# Allegro board FPCBMirror.brd
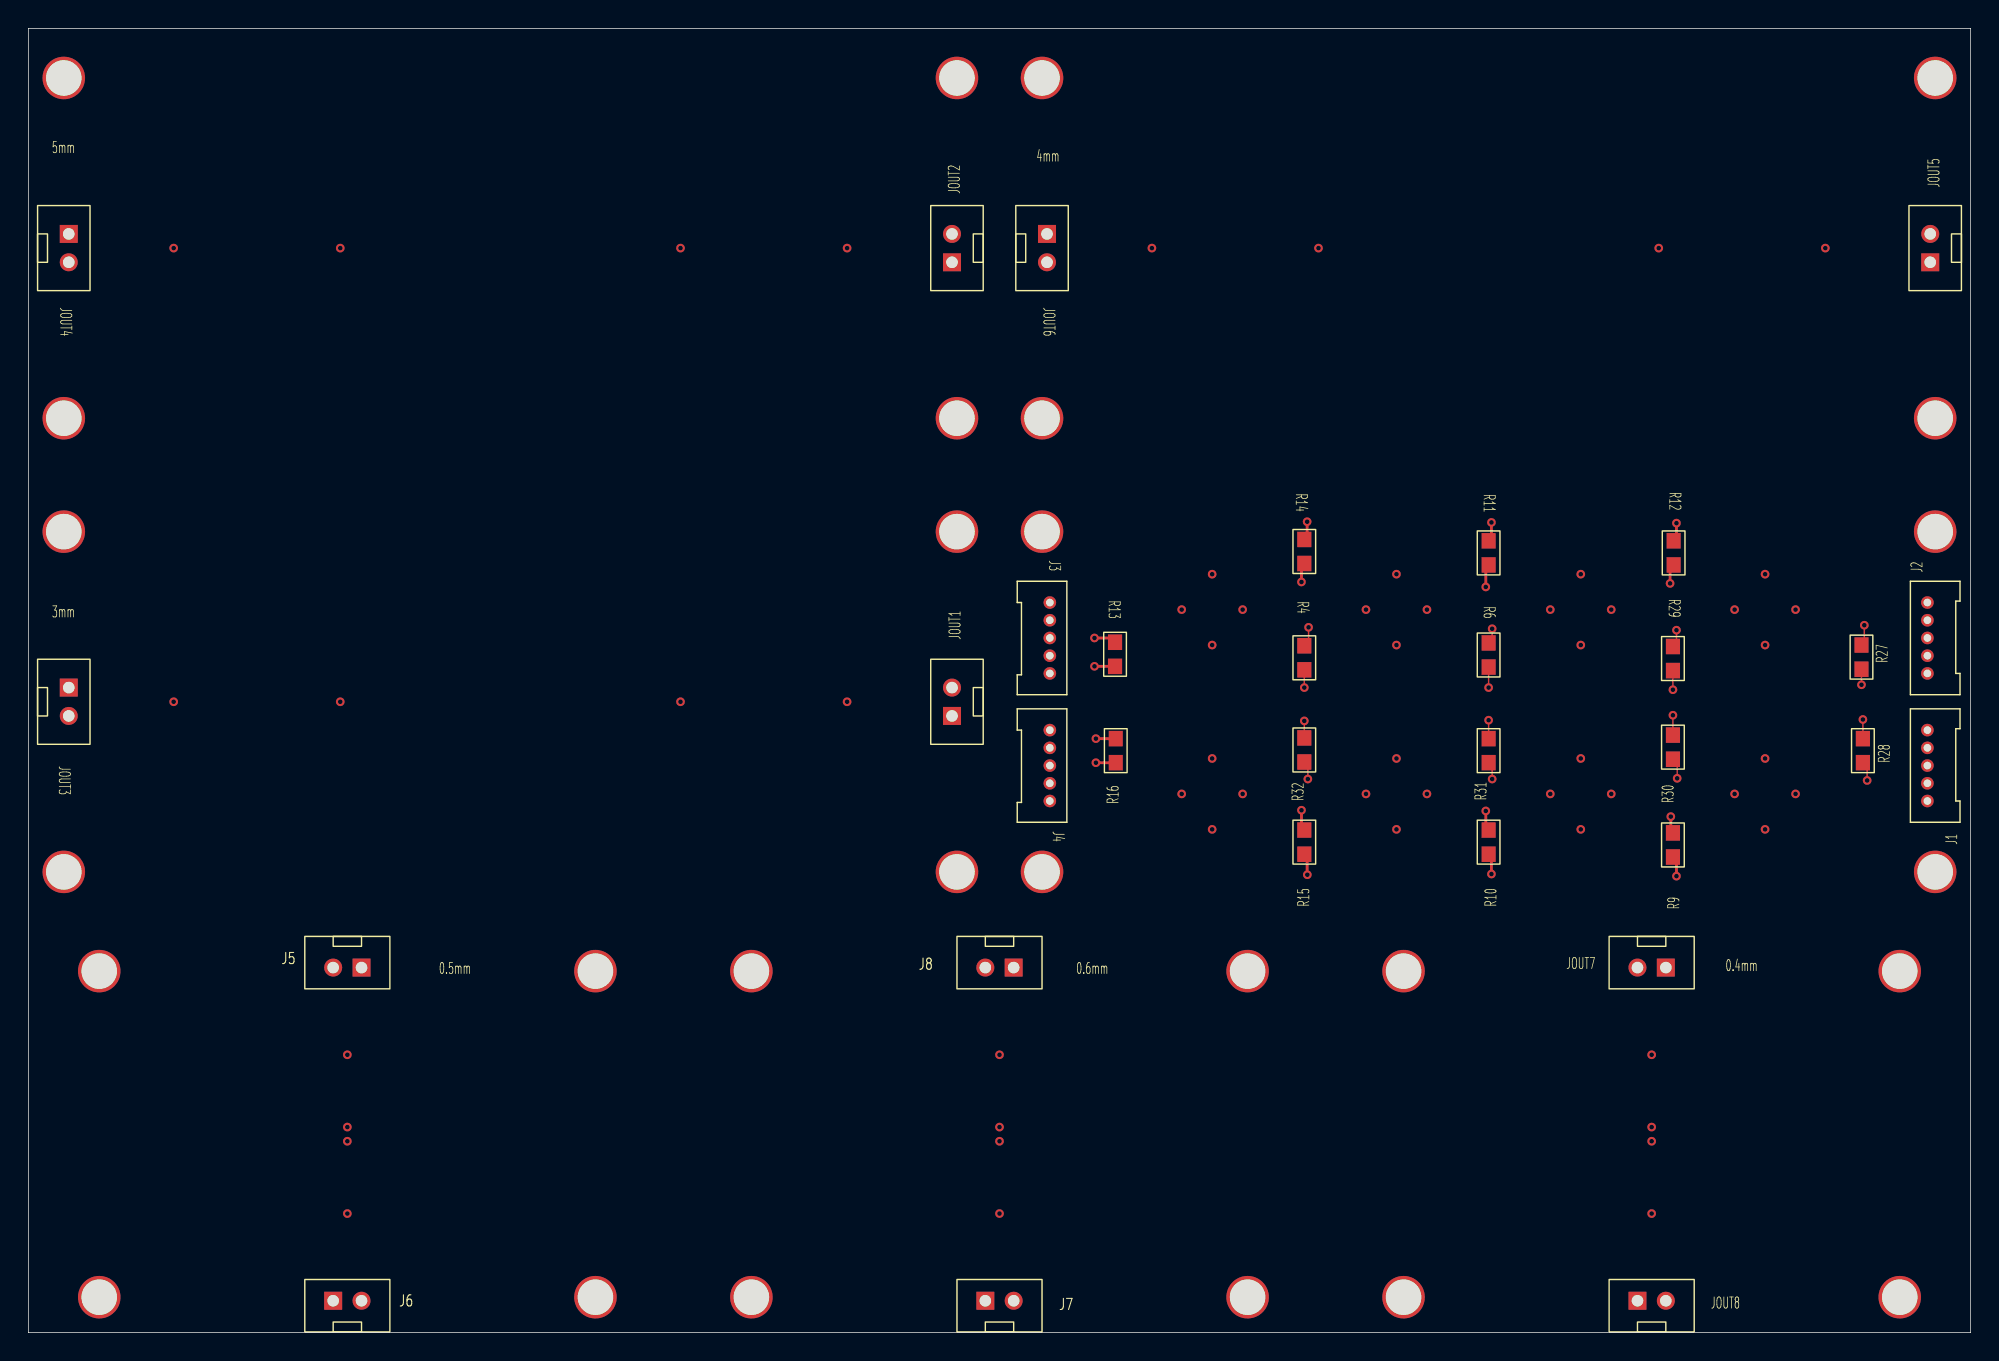
[diagram p0: board, top side]
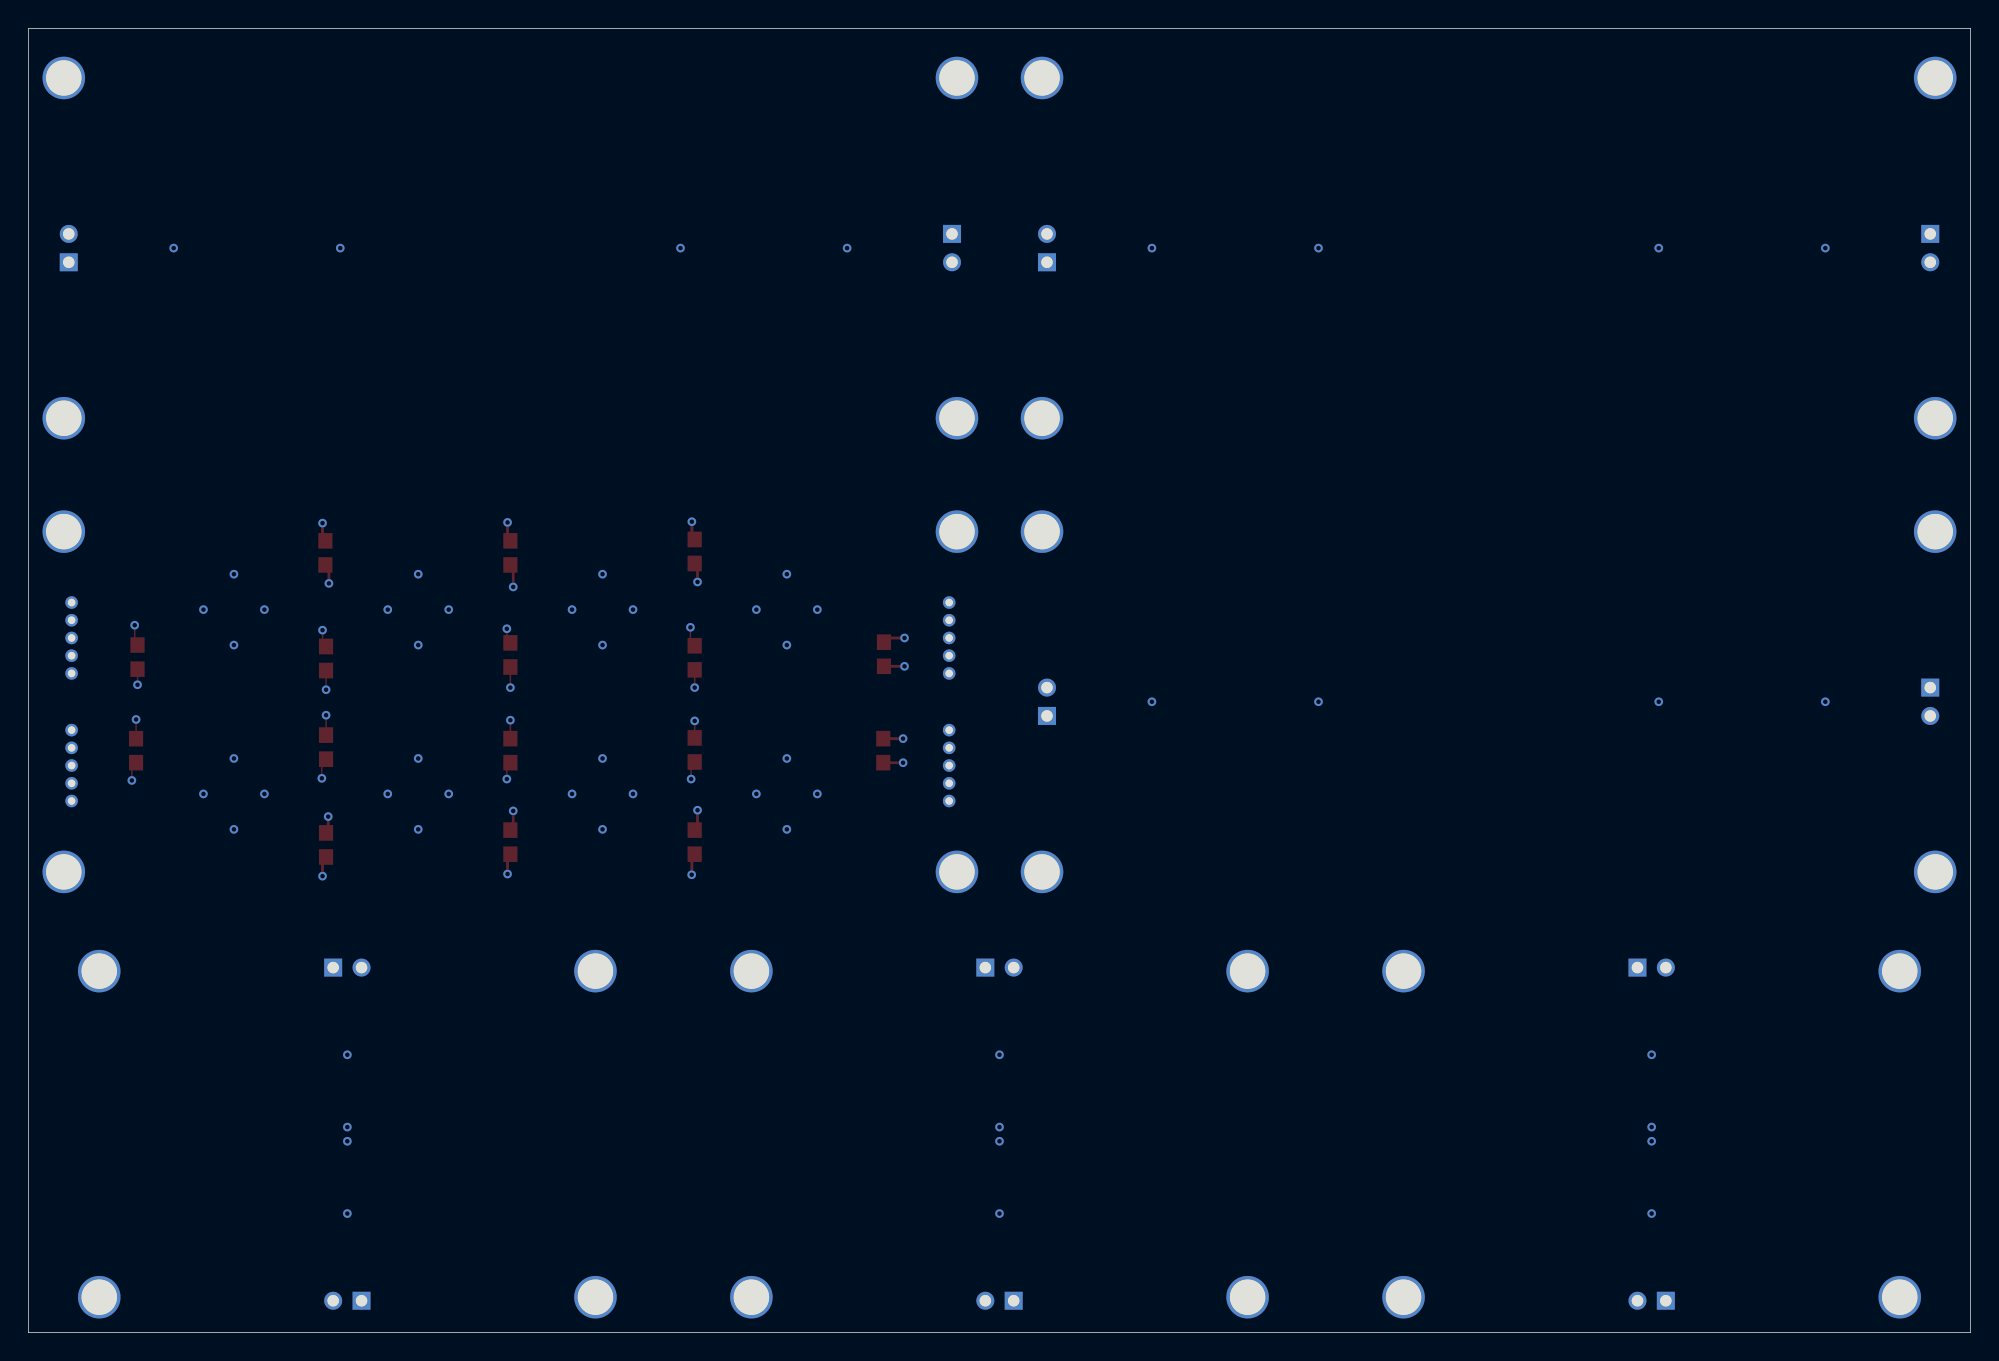
[diagram p1: board, bottom side, seen from below]

Outline 137 x 92 mm; copper layers: TOP, LAYER1, LAYER2, LAYER3, LAYER4, BOTTOM. Coordinates in mm from the lower left corner of the outline.
Outline path: 0,92 137,92 137,0 0,0 0,92

## Design rules (mm)
constraint set DEFAULT: min track width 0.1

## Placement (name value [footprint] x y rotation side)
J1  -  [DF13-5P]  133.95 40 90 top
J2  -  [DF13-5P]  133.95 49 90 top
J3  -  [DF13-5P]  72.05 49 270 top
J4  -  [DF13-5P]  72.05 40 270 top
J5  CON2  [53253-2P]  16.5 25.75 180 top
J6  CON2  [53253-2P]  28.5 2.25 0 top
J7  CON2  [53253-2P]  74.5 2.25 0 top
J8  CON2  [53253-2P]  62.5 25.75 180 top
JOUT1  CON2  [53253-2P]  65.15 50.5 90 top
JOUT2  CON2  [53253-2P]  65.15 82.5 90 top
JOUT3  CON2  [53253-2P]  2.85 38.5 270 top
JOUT4  CON2  [53253-2P]  2.85 70.5 270 top
JOUT5  CON2  [53253-2P]  134.15 82.5 90 top
JOUT6  CON2  [53253-2P]  71.85 70.5 270 top
JOUT7  CON2  [53253-2P]  108.5 25.75 180 top
JOUT8  CON2  [53253-2P]  120.5 2.25 0 top
NOREF  -  [unnamed]  51.23 3.31 0 top
NOREF#2  -  [unnamed]  2.73 89.31 0 top
NOREF#3  -  [unnamed]  134.73 57.31 0 top
NOREF#4  -  [#2]  62.5 12.09 0 top
NOREF#5  -  [unnamed]  97.23 3.31 0 top
NOREF#6  -  [unnamed]  134.73 33.31 0 top
NOREF#7  -  [unnamed]  97.23 26.31 0 top
NOREF#8  -  [unnamed]  71.73 57.31 0 top
NOREF#9  -  [unnamed]  2.73 33.31 0 top
NOREF#10  -  [#2]  67.48 20.5 90 top
NOREF#11  -  [unnamed]  40.23 26.31 0 top
NOREF#12  -  [unnamed]  134.73 89.31 0 top
NOREF#13  -  [unnamed]  86.23 26.31 0 top
NOREF#14  -  [unnamed]  65.73 33.31 0 top
NOREF#15  -  [#2]  72.35 7.5 90 top
NOREF#16  -  [#2]  83.9 5 90 top
NOREF#17  -  [unnamed]  5.23 26.31 0 top
NOREF#18  -  [unnamed]  71.73 33.31 0 top
NOREF#19  -  [unnamed]  65.73 65.31 0 top
NOREF#20  -  [unnamed]  134.73 65.31 0 top
NOREF#21  -  [unnamed]  2.73 65.31 0 top
NOREF#22  -  [#2]  68.2 21.84 0 top
NOREF#23  -  [#2]  46 5.31 0 top
NOREF#24  -  [unnamed]  65.73 57.31 0 top
NOREF#25  -  [unnamed]  5.23 3.31 0 top
NOREF#26  -  [unnamed]  65.73 89.31 0 top
NOREF#27  -  [unnamed]  2.73 57.31 0 top
NOREF#28  -  [unnamed]  132.23 3.31 0 top
NOREF#29  -  [#2]  48.92 0 90 top
NOREF#30  -  [unnamed]  71.73 65.31 0 top
NOREF#31  -  [unnamed]  51.23 26.31 0 top
NOREF#32  -  [unnamed]  86.23 3.31 0 top
NOREF#33  -  [#2]  48.5 10.5 0 top
NOREF#34  -  [unnamed]  40.23 3.31 0 top
NOREF#35  -  [#2]  -16 -38.6 0 top
NOREF#36  -  [unnamed]  132.23 26.31 0 top
NOREF#37  -  [#2]  0 0 0 top
NOREF#38  -  [unnamed]  71.73 89.31 0 top
NOREF#39  -  [#2]  137 0 90 top
R4  10K 1/10w 1%  [SMD0603]  90 47.6 270 top
R6  10K 1/10w 1%  [SMD0603]  103 47.8 270 top
R9  10K 1/10w 1%  [SMD0603]  116 34.4 90 top
R10  10K 1/10w 1%  [SMD0603]  103 34.6 90 top
R11  10K 1/10w 1%  [SMD0603]  103 55 270 top
R12  10K 1/10w 1%  [SMD0603]  116.05 55 270 top
R13  10K 1/10w 1%  [SMD0603]  76.65 47.85 270 top
R14  10K 1/10w 1%  [SMD0603]  90 55.1 90 top
R15  10K 1/10w 1%  [SMD0603]  90 34.6 90 top
R16  10K 1/10w 1%  [SMD0603]  76.7 41.05 90 top
R27  10K 1/10w 1%  [SMD0603]  129.3 47.65 90 top
R28  10K 1/10w 1%  [SMD0603]  129.4 41.05 90 top
R29  10K 1/10w 1%  [SMD0603]  116 47.55 90 top
R30  10K 1/10w 1%  [SMD0603]  116 41.3 90 top
R31  10K 1/10w 1%  [SMD0603]  103 41.05 90 top
R32  10K 1/10w 1%  [SMD0603]  90 41.1 90 top

## Library data of the parts
J1-J4 = CON5
J5-J8 JOUT1-JOUT8 = CON2
R4 R6 R9-R16 R27-R32 = R

## Footprints (pads in the part's own frame, mm; a bottom-side part is the same pattern mirrored in y, then rotated)
53253-2P
  rect 1.27x1.27 hole 0.813: 1(-7,0)
  round 1.27 hole 0.813: 2(-5,0)
DF13-5P
  round 0.889 hole 0.533: 1(-2.5,0) 2(-1.25,0) 3(0,0) 4(1.25,0) 5(2.5,0)
SMD0603
  rect 1.1x1 smd: 1(-0.85,0) 2(0.85,0)
unnamed
  round 3 hole 2.5: 1(-0.229,-0.813)

## Nets
N3020782: JOUT2.1 JOUT2.2
N3020794: JOUT3.1 JOUT3.2
N3020806: JOUT1.1 JOUT1.2
N3020818: JOUT4.1 JOUT4.2
N3020998: J1.1 J1.2 R10.1 R10.2
N3021010: J1.3 J1.4 R9.1 R9.2
N3021347: R4.1 R4.2
N3021519: R6.1 R6.2
N3022339: J2.1 J2.2 R12.1 R12.2
N3022351: J2.3 J2.4 R11.1 R11.2
N3022586: J3.1 J3.2 R14.1 R14.2
N3022598: J3.3 J3.4 R13.1 R13.2
N3022833: J4.1 J4.2 R16.1 R16.2
N3022845: J4.3 J4.4 R15.1 R15.2
N3024190: JOUT5.1 JOUT5.2
N3024220: JOUT6.1 JOUT6.2
N3024232: JOUT8.1 JOUT8.2
N3024244: JOUT7.1 JOUT7.2
N3025698: R27.1 R27.2
N3025754: R28.1 R28.2
N3025984: R29.1 R29.2
N3026004: R30.1 R30.2
N3026060: R31.1 R31.2
N3026080: R32.1 R32.2
N3027014: J5.1 J5.2
N3027026: J6.1 J6.2
N3027142: J7.1 J7.2
N3027154: J8.1 J8.2

Pads without a net: J1 5; J2 5; J3 5; J4 5; NOREF 1; NOREF#2 1; NOREF#3 1; NOREF#5 1; NOREF#6 1; NOREF#7 1; NOREF#8 1; NOREF#9 1; NOREF#11 1; NOREF#12 1; NOREF#13 1; NOREF#14 1; NOREF#17 1; NOREF#18 1; NOREF#19 1; NOREF#20 1; NOREF#21 1; NOREF#24 1; NOREF#25 1; NOREF#26 1; NOREF#27 1; NOREF#28 1; NOREF#30 1; NOREF#31 1; NOREF#32 1; NOREF#34 1; NOREF#36 1; NOREF#38 1

## Via types
v1: diameter 0.61, hole 0.33, TOP to BOTTOM, 88 vias

## Routing (per net, layer and track width the routed paths; a pad name or vN(x,y) marks a point on that pad's centre or on a via; arc(x,y) is an arc through that point)
N3020782: length 15.6
  LAYER2 w0.1: JOUT2.2 64.24,76.59 arc(64.14,76.52) 64.03,76.5 v1(57.75,76.5)
  LAYER3 w0.1: JOUT2.1 64.24,76.41 arc(64.14,76.48) 64.03,76.5 v1(57.75,76.5)
N3020794: length 11618.6
  LAYER1 w0.2: v1(10.25,44.5) 10.25,33.65 arc(10.54,32.94) 11.25,32.65 56.4,32.65 arc(56.75,32.8) 56.9,33.15 56.9,55.8 arc(56.75,56.15) 56.4,56.3 11.55,56.3 arc(11.2,56.15) 11.05,55.8 11.05,33.45 arc(11.2,33.1) 11.55,32.95 56.1,32.95 arc(56.45,33.1) 56.6,33.45 56.6,55.5 arc(56.45,55.85) 56.1,56 11.85,56 arc(11.5,55.85) 11.35,55.5 11.35,33.75 arc(11.5,33.4) 11.85,33.25 55.8,33.25 arc(56.15,33.4) 56.3,33.75 56.3,55.2 arc(56.15,55.55) 55.8,55.7 12.15,55.7 arc(11.8,55.55) 11.65,55.2 11.65,34.05 arc(11.8,33.7) 12.15,33.55 55.5,33.55 arc(55.85,33.7) 56,34.05 56,54.9 arc(55.85,55.25) 55.5,55.4 12.45,55.4 arc(12.1,55.25) 11.95,54.9 11.95,34.35 arc(12.1,34) 12.45,33.85 55.2,33.85 arc(55.55,34) 55.7,34.35 55.7,54.6 arc(55.55,54.95) 55.2,55.1 12.75,55.1 arc(12.4,54.95) 12.25,54.6 12.25,34.65 arc(12.4,34.3) 12.75,34.15 54.9,34.15 arc(55.25,34.3) 55.4,34.65 55.4,54.3 arc(55.25,54.65) 54.9,54.8 13.05,54.8 arc(12.7,54.65) 12.55,54.3 12.55,34.95 arc(12.7,34.6) 13.05,34.45 54.6,34.45 arc(54.95,34.6) 55.1,34.95 55.1,54 arc(54.95,54.35) 54.6,54.5 13.35,54.5 arc(13,54.35) 12.85,54 12.85,35.25 arc(13,34.9) 13.35,34.75 54.3,34.75 arc(54.65,34.9) 54.8,35.25 54.8,53.7 arc(54.65,54.05) 54.3,54.2 13.65,54.2 arc(13.3,54.05) 13.15,53.7 13.15,35.55 arc(13.3,35.2) 13.65,35.05 54,35.05 arc(54.35,35.2) 54.5,35.55 54.5,53.4 arc(54.35,53.75) 54,53.9 13.95,53.9 arc(13.6,53.75) 13.45,53.4 13.45,35.85 arc(13.6,35.5) 13.95,35.35 53.7,35.35 arc(54.05,35.5) 54.2,35.85 54.2,53.1 arc(54.05,53.45) 53.7,53.6 14.25,53.6 arc(13.9,53.45) 13.75,53.1 13.75,36.15 arc(13.9,35.8) 14.25,35.65 53.4,35.65 arc(53.75,35.8) 53.9,36.15 53.9,52.8 arc(53.75,53.15) 53.4,53.3 14.55,53.3 arc(14.2,53.15) 14.05,52.8 14.05,36.45 arc(14.2,36.1) 14.55,35.95 53.1,35.95 arc(53.45,36.1) 53.6,36.45 53.6,52.5 arc(53.45,52.85) 53.1,53 14.85,53 arc(14.5,52.85) 14.35,52.5 14.35,36.75 arc(14.5,36.4) 14.85,36.25 52.8,36.25 arc(53.15,36.4) 53.3,36.75 53.3,52.2 arc(53.15,52.55) 52.8,52.7 15.15,52.7 arc(14.8,52.55) 14.65,52.2 14.65,37.05 arc(14.8,36.7) 15.15,36.55 52.5,36.55 arc(52.85,36.7) 53,37.05 53,51.9 arc(52.85,52.25) 52.5,52.4 15.45,52.4 arc(15.1,52.25) 14.95,51.9 14.95,37.35 arc(15.1,37) 15.45,36.85 52.2,36.85 arc(52.55,37) 52.7,37.35 52.7,51.6 arc(52.55,51.95) 52.2,52.1 15.75,52.1 arc(15.4,51.95) 15.25,51.6 15.25,37.65 arc(15.4,37.3) 15.75,37.15 51.9,37.15 arc(52.25,37.3) 52.4,37.65 52.4,51.3 arc(52.25,51.65) 51.9,51.8 16.05,51.8 arc(15.7,51.65) 15.55,51.3 15.55,37.95 arc(15.7,37.6) 16.05,37.45 51.6,37.45 arc(51.95,37.6) 52.1,37.95 52.1,51 arc(51.95,51.35) 51.6,51.5 16.35,51.5 arc(16,51.35) 15.85,51 15.85,38.25 arc(16,37.9) 16.35,37.75 51.3,37.75 arc(51.65,37.9) 51.8,38.25 51.8,50.7 arc(51.65,51.05) 51.3,51.2 16.65,51.2 arc(16.3,51.05) 16.15,50.7 16.15,38.55 arc(16.3,38.2) 16.65,38.05 51,38.05 arc(51.35,38.2) 51.5,38.55 51.5,50.4 arc(51.35,50.75) 51,50.9 16.95,50.9 arc(16.6,50.75) 16.45,50.4 16.45,38.85 arc(16.6,38.5) 16.95,38.35 50.7,38.35 arc(51.05,38.5) 51.2,38.85 51.2,50.1 arc(51.05,50.45) 50.7,50.6 17.25,50.6 arc(16.9,50.45) 16.75,50.1 16.75,39.15 arc(16.9,38.8) 17.25,38.65 50.4,38.65 arc(50.75,38.8) 50.9,39.15 50.9,49.8 arc(50.75,50.15) 50.4,50.3 17.55,50.3 arc(17.2,50.15) 17.05,49.8 17.05,39.45 arc(17.2,39.1) 17.55,38.95 50.1,38.95 arc(50.45,39.1) 50.6,39.45 50.6,49.5 arc(50.45,49.85) 50.1,50 17.85,50 arc(17.5,49.85) 17.35,49.5 17.35,39.75 arc(17.5,39.4) 17.85,39.25 49.8,39.25 arc(50.15,39.4) 50.3,39.75 50.3,49.2 arc(50.15,49.55) 49.8,49.7 18.15,49.7 arc(17.8,49.55) 17.65,49.2 17.65,40.05 arc(17.8,39.7) 18.15,39.55 49.5,39.55 arc(49.85,39.7) 50,40.05 50,48.9 arc(49.85,49.25) 49.5,49.4 18.45,49.4 arc(18.1,49.25) 17.95,48.9 17.95,40.35 arc(18.1,40) 18.45,39.85 49.2,39.85 arc(49.55,40) 49.7,40.35 49.7,48.6 arc(49.55,48.95) 49.2,49.1 18.75,49.1 arc(18.4,48.95) 18.25,48.6 18.25,40.65 arc(18.4,40.3) 18.75,40.15 48.9,40.15 arc(49.25,40.3) 49.4,40.65 49.4,48.3 arc(49.25,48.65) 48.9,48.8 19.05,48.8 arc(18.7,48.65) 18.55,48.3 18.55,40.95 arc(18.7,40.6) 19.05,40.45 48.6,40.45 arc(48.95,40.6) 49.1,40.95 49.1,48 arc(48.95,48.35) 48.6,48.5 19.35,48.5 arc(19,48.35) 18.85,48 18.85,41.25 arc(19,40.9) 19.35,40.75 48.3,40.75 arc(48.65,40.9) 48.8,41.25 48.8,47.7 arc(48.65,48.05) 48.3,48.2 19.65,48.2 arc(19.3,48.05) 19.15,47.7 19.15,41.55 arc(19.3,41.2) 19.65,41.05 48,41.05 arc(48.35,41.2) 48.5,41.55 48.5,47.4 arc(48.35,47.75) 48,47.9 19.95,47.9 arc(19.6,47.75) 19.45,47.4 19.45,41.85 arc(19.6,41.5) 19.95,41.35 47.7,41.35 arc(48.05,41.5) 48.2,41.85 48.2,47.1 arc(48.05,47.45) 47.7,47.6 20.25,47.6 arc(19.9,47.45) 19.75,47.1 19.75,42.15 arc(19.9,41.8) 20.25,41.65 47.4,41.65 arc(47.75,41.8) 47.9,42.15 47.9,46.8 arc(47.75,47.15) 47.4,47.3 20.55,47.3 arc(20.2,47.15) 20.05,46.8 20.05,42.45 arc(20.2,42.1) 20.55,41.95 47.1,41.95 arc(47.45,42.1) 47.6,42.45 47.6,46.5 arc(47.45,46.85) 47.1,47 20.85,47 arc(20.5,46.85) 20.35,46.5 20.35,42.75 arc(20.5,42.4) 20.85,42.25 46.8,42.25 arc(47.15,42.4) 47.3,42.75 47.3,46.2 arc(47.15,46.55) 46.8,46.7 22.5,46.7 arc(22.15,46.55) 22,46.2 v1(22,44.5)
  LAYER2 w0.1: 9.55,44.8 4.08,44.8 arc(4.01,44.82) 3.94,44.86 3.36,45.44 arc(3.29,45.48) 3.22,45.5 3.05,45.5 arc(3.19,45.44) 3.25,45.3 3.25,45.18 arc(3.27,45.11) 3.31,45.04 3.79,44.56 arc(3.86,44.52) 3.93,44.5 9.55,44.5 ; JOUT3.1 2.85,45.13 arc(2.87,45.06) 2.91,44.99 3.64,44.26 arc(3.71,44.22) 3.78,44.2 9.55,44.2
  LAYER2 w0.3: v1(22,44.5) 22,42.6 arc(22.15,42.25) 22.5,42.1 46.95,42.1 arc(47.3,42.25) 47.45,42.6 47.45,46.35 arc(47.3,46.7) 46.95,46.85 20.7,46.85 arc(20.35,46.7) 20.2,46.35 20.2,42.2 arc(20.35,41.85) 20.7,41.7 47.35,41.7 arc(47.7,41.85) 47.85,42.2 47.85,46.75 arc(47.7,47.1) 47.35,47.25 20.3,47.25 arc(19.95,47.1) 19.8,46.75 19.8,41.8 arc(19.95,41.45) 20.3,41.3 47.75,41.3 arc(48.1,41.45) 48.25,41.8 48.25,47.15 arc(48.1,47.5) 47.75,47.65 19.9,47.65 arc(19.55,47.5) 19.4,47.15 19.4,41.4 arc(19.55,41.05) 19.9,40.9 48.15,40.9 arc(48.5,41.05) 48.65,41.4 48.65,47.55 arc(48.5,47.9) 48.15,48.05 19.5,48.05 arc(19.15,47.9) 19,47.55 19,41 arc(19.15,40.65) 19.5,40.5 48.55,40.5 arc(48.9,40.65) 49.05,41 49.05,47.95 arc(48.9,48.3) 48.55,48.45 19.1,48.45 arc(18.75,48.3) 18.6,47.95 18.6,40.6 arc(18.75,40.25) 19.1,40.1 48.95,40.1 arc(49.3,40.25) 49.45,40.6 49.45,48.35 arc(49.3,48.7) 48.95,48.85 18.7,48.85 arc(18.35,48.7) 18.2,48.35 18.2,40.2 arc(18.35,39.85) 18.7,39.7 49.35,39.7 arc(49.7,39.85) 49.85,40.2 49.85,48.75 arc(49.7,49.1) 49.35,49.25 18.3,49.25 arc(17.95,49.1) 17.8,48.75 17.8,39.8 arc(17.95,39.45) 18.3,39.3 49.75,39.3 arc(50.1,39.45) 50.25,39.8 50.25,49.15 arc(50.1,49.5) 49.75,49.65 17.9,49.65 arc(17.55,49.5) 17.4,49.15 17.4,39.4 arc(17.55,39.05) 17.9,38.9 50.15,38.9 arc(50.5,39.05) 50.65,39.4 50.65,49.55 arc(50.5,49.9) 50.15,50.05 17.5,50.05 arc(17.15,49.9) 17,49.55 17,39 arc(17.15,38.65) 17.5,38.5 50.55,38.5 arc(50.9,38.65) 51.05,39 51.05,49.95 arc(50.9,50.3) 50.55,50.45 17.1,50.45 arc(16.75,50.3) 16.6,49.95 16.6,38.6 arc(16.75,38.25) 17.1,38.1 50.95,38.1 arc(51.3,38.25) 51.45,38.6 51.45,50.35 arc(51.3,50.7) 50.95,50.85 16.7,50.85 arc(16.35,50.7) 16.2,50.35 16.2,38.2 arc(16.35,37.85) 16.7,37.7 51.35,37.7 arc(51.7,37.85) 51.85,38.2 51.85,50.75 arc(51.7,51.1) 51.35,51.25 16.3,51.25 arc(15.95,51.1) 15.8,50.75 15.8,37.8 arc(15.95,37.45) 16.3,37.3 51.75,37.3 arc(52.1,37.45) 52.25,37.8 52.25,51.15 arc(52.1,51.5) 51.75,51.65 15.9,51.65 arc(15.55,51.5) 15.4,51.15 15.4,37.4 arc(15.55,37.05) 15.9,36.9 52.15,36.9 arc(52.5,37.05) 52.65,37.4 52.65,51.55 arc(52.5,51.9) 52.15,52.05 15.5,52.05 arc(15.15,51.9) 15,51.55 15,36.95 arc(15.13,36.63) 15.45,36.5 52.55,36.5 arc(52.9,36.65) 53.05,37 53.05,51.95 arc(52.9,52.3) 52.55,52.45 15.1,52.45 arc(14.75,52.3) 14.6,51.95 14.6,36.6 arc(14.75,36.25) 15.1,36.1 52.95,36.1 arc(53.3,36.25) 53.45,36.6 53.45,52.35 arc(53.3,52.7) 52.95,52.85 14.7,52.85 arc(14.35,52.7) 14.2,52.35 14.2,36.2 arc(14.35,35.85) 14.7,35.7 53.35,35.7 arc(53.7,35.85) 53.85,36.2 53.85,52.75 arc(53.7,53.1) 53.35,53.25 14.3,53.25 arc(13.95,53.1) 13.8,52.75 13.8,35.65 arc(13.9,35.4) 14.15,35.3 53.75,35.3 arc(54.1,35.45) 54.25,35.8 54.25,53.15 arc(54.1,53.5) 53.75,53.65 13.9,53.65 arc(13.55,53.5) 13.4,53.15 13.4,35.3 arc(13.52,35.02) 13.8,34.9 54.15,34.9 arc(54.5,35.05) 54.65,35.4 54.65,53.55 arc(54.5,53.9) 54.15,54.05 13.4,54.05 arc(13.12,53.93) 13,53.65 13,35 arc(13.15,34.65) 13.5,34.5 54.55,34.5 arc(54.9,34.65) 55.05,35 55.05,53.95 arc(54.9,54.3) 54.55,54.45 12.95,54.45 arc(12.7,54.35) 12.6,54.1 12.6,34.6 arc(12.75,34.25) 13.1,34.1 54.95,34.1 arc(55.3,34.25) 55.45,34.6 55.45,54.35 arc(55.3,54.7) 54.95,54.85 12.7,54.85 arc(12.35,54.7) 12.2,54.35 12.2,34.2 arc(12.35,33.85) 12.7,33.7 55.35,33.7 arc(55.7,33.85) 55.85,34.2 55.85,54.75 arc(55.7,55.1) 55.35,55.25 12.3,55.25 arc(11.95,55.1) 11.8,54.75 11.8,33.8 arc(11.95,33.45) 12.3,33.3 55.75,33.3 arc(56.1,33.45) 56.25,33.8 56.25,55.15 arc(56.1,55.5) 55.75,55.65 11.9,55.65 arc(11.55,55.5) 11.4,55.15 11.4,33.4 arc(11.55,33.05) 11.9,32.9 56.15,32.9 arc(56.5,33.05) 56.65,33.4 56.65,55.55 arc(56.5,55.9) 56.15,56.05 11.5,56.05 arc(11.15,55.9) 11,55.55 11,33 arc(11.15,32.65) 11.5,32.5 56.55,32.5 arc(56.9,32.65) 57.05,33 57.05,55.95 arc(56.9,56.3) 56.55,56.45 11,56.45 arc(10.65,56.3) 10.5,55.95 10.5,46.21 arc(10.46,46.02) 10.35,45.85 9.7,45.2 arc(9.59,45.03) 9.55,44.84 9.55,44.2
  LAYER3 w0.1: 9.55,44.5 3.98,44.5 arc(3.86,44.48) 3.76,44.41 JOUT3.2 ; JOUT3.2 3.27,43.5 arc(3.34,43.52) 3.41,43.56 3.89,44.04 arc(4.07,44.16) 4.28,44.2 9.55,44.2 ; JOUT3.2 2.85,43.72 arc(2.87,43.84) 2.94,43.94 3.71,44.71 arc(3.81,44.78) 3.93,44.8 9.55,44.8
  LAYER3 w0.3: v1(46,44.5) 46,42.8 arc(45.85,42.45) 45.5,42.3 20.9,42.3 arc(20.55,42.45) 20.4,42.8 20.4,46.55 arc(20.55,46.9) 20.9,47.05 47.15,47.05 arc(47.5,46.9) 47.65,46.55 47.65,42.4 arc(47.5,42.05) 47.15,41.9 20.5,41.9 arc(20.15,42.05) 20,42.4 20,46.95 arc(20.15,47.3) 20.5,47.45 47.55,47.45 arc(47.9,47.3) 48.05,46.95 48.05,42 arc(47.9,41.65) 47.55,41.5 20.1,41.5 arc(19.75,41.65) 19.6,42 19.6,47.35 arc(19.75,47.7) 20.1,47.85 47.95,47.85 arc(48.3,47.7) 48.45,47.35 48.45,41.6 arc(48.3,41.25) 47.95,41.1 19.7,41.1 arc(19.35,41.25) 19.2,41.6 19.2,47.75 arc(19.35,48.1) 19.7,48.25 48.35,48.25 arc(48.7,48.1) 48.85,47.75 48.85,41.2 arc(48.7,40.85) 48.35,40.7 19.3,40.7 arc(18.95,40.85) 18.8,41.2 18.8,48.15 arc(18.95,48.5) 19.3,48.65 48.75,48.65 arc(49.1,48.5) 49.25,48.15 49.25,40.8 arc(49.1,40.45) 48.75,40.3 18.9,40.3 arc(18.55,40.45) 18.4,40.8 18.4,48.55 arc(18.55,48.9) 18.9,49.05 49.15,49.05 arc(49.5,48.9) 49.65,48.55 49.65,40.4 arc(49.5,40.05) 49.15,39.9 18.5,39.9 arc(18.15,40.05) 18,40.4 18,48.95 arc(18.15,49.3) 18.5,49.45 49.55,49.45 arc(49.9,49.3) 50.05,48.95 50.05,40 arc(49.9,39.65) 49.55,39.5 18.1,39.5 arc(17.75,39.65) 17.6,40 17.6,49.35 arc(17.75,49.7) 18.1,49.85 49.95,49.85 arc(50.3,49.7) 50.45,49.35 50.45,39.6 arc(50.3,39.25) 49.95,39.1 17.7,39.1 arc(17.35,39.25) 17.2,39.6 17.2,49.75 arc(17.35,50.1) 17.7,50.25 50.35,50.25 arc(50.7,50.1) 50.85,49.75 50.85,39.2 arc(50.7,38.85) 50.35,38.7 17.3,38.7 arc(16.95,38.85) 16.8,39.2 16.8,50.15 arc(16.95,50.5) 17.3,50.65 50.75,50.65 arc(51.1,50.5) 51.25,50.15 51.25,38.8 arc(51.1,38.45) 50.75,38.3 16.9,38.3 arc(16.55,38.45) 16.4,38.8 16.4,50.55 arc(16.55,50.9) 16.9,51.05 51.15,51.05 arc(51.5,50.9) 51.65,50.55 51.65,38.4 arc(51.5,38.05) 51.15,37.9 16.5,37.9 arc(16.15,38.05) 16,38.4 16,50.95 arc(16.15,51.3) 16.5,51.45 51.55,51.45 arc(51.9,51.3) 52.05,50.95 52.05,38 arc(51.9,37.65) 51.55,37.5 16.1,37.5 arc(15.75,37.65) 15.6,38 15.6,51.35 arc(15.75,51.7) 16.1,51.85 51.95,51.85 arc(52.3,51.7) 52.45,51.35 52.45,37.6 arc(52.3,37.25) 51.95,37.1 15.7,37.1 arc(15.35,37.25) 15.2,37.6 15.2,51.75 arc(15.35,52.1) 15.7,52.25 52.35,52.25 arc(52.7,52.1) 52.85,51.75 52.85,37.2 arc(52.7,36.85) 52.35,36.7 15.3,36.7 arc(14.95,36.85) 14.8,37.2 14.8,52.15 arc(14.95,52.5) 15.3,52.65 52.75,52.65 arc(53.1,52.5) 53.25,52.15 53.25,36.8 arc(53.1,36.45) 52.75,36.3 14.9,36.3 arc(14.55,36.45) 14.4,36.8 14.4,52.55 arc(14.55,52.9) 14.9,53.05 53.15,53.05 arc(53.5,52.9) 53.65,52.55 53.65,36.4 arc(53.5,36.05) 53.15,35.9 14.5,35.9 arc(14.15,36.05) 14,36.4 14,52.95 arc(14.15,53.3) 14.5,53.45 53.55,53.45 arc(53.9,53.3) 54.05,52.95 54.05,36 arc(53.9,35.65) 53.55,35.5 14.1,35.5 arc(13.75,35.65) 13.6,36 13.6,53.35 arc(13.75,53.7) 14.1,53.85 53.95,53.85 arc(54.3,53.7) 54.45,53.35 54.45,35.6 arc(54.3,35.25) 53.95,35.1 13.7,35.1 arc(13.35,35.25) 13.2,35.6 13.2,53.75 arc(13.35,54.1) 13.7,54.25 54.35,54.25 arc(54.7,54.1) 54.85,53.75 54.85,35.2 arc(54.7,34.85) 54.35,34.7 13.3,34.7 arc(12.95,34.85) 12.8,35.2 12.8,54.15 arc(12.95,54.5) 13.3,54.65 54.75,54.65 arc(55.1,54.5) 55.25,54.15 55.25,34.8 arc(55.1,34.45) 54.75,34.3 12.9,34.3 arc(12.55,34.45) 12.4,34.8 12.4,54.55 arc(12.55,54.9) 12.9,55.05 55.15,55.05 arc(55.5,54.9) 55.65,54.55 55.65,34.4 arc(55.5,34.05) 55.15,33.9 12.5,33.9 arc(12.15,34.05) 12,34.4 12,54.95 arc(12.15,55.3) 12.5,55.45 55.55,55.45 arc(55.9,55.3) 56.05,54.95 56.05,34 arc(55.9,33.65) 55.55,33.5 12.1,33.5 arc(11.75,33.65) 11.6,34 11.6,55.35 arc(11.75,55.7) 12.1,55.85 55.95,55.85 arc(56.3,55.7) 56.45,55.35 56.45,33.6 arc(56.3,33.25) 55.95,33.1 11.7,33.1 arc(11.35,33.25) 11.2,33.6 11.2,55.75 arc(11.35,56.1) 11.7,56.25 56.35,56.25 arc(56.7,56.1) 56.85,55.75 56.85,33.2 arc(56.7,32.85) 56.35,32.7 10.75,32.7 arc(10.57,32.77) 10.5,32.95 10.5,42.79 arc(10.46,42.98) 10.35,43.15 9.7,43.8 arc(9.59,43.97) 9.55,44.16 9.55,44.8
  LAYER4 w0.2: v1(46,44.5) 46,46.35 arc(45.85,46.7) 45.5,46.85 20.7,46.85 arc(20.35,46.7) 20.2,46.35 20.2,42.6 arc(20.35,42.25) 20.7,42.1 47.25,42.1 arc(47.6,42.25) 47.75,42.6 47.75,46.65 arc(47.6,47) 47.25,47.15 20.4,47.15 arc(20.05,47) 19.9,46.65 19.9,42.3 arc(20.05,41.95) 20.4,41.8 47.55,41.8 arc(47.9,41.95) 48.05,42.3 48.05,46.95 arc(47.9,47.3) 47.55,47.45 20.1,47.45 arc(19.75,47.3) 19.6,46.95 19.6,42 arc(19.75,41.65) 20.1,41.5 47.85,41.5 arc(48.2,41.65) 48.35,42 48.35,47.25 arc(48.2,47.6) 47.85,47.75 19.8,47.75 arc(19.45,47.6) 19.3,47.25 19.3,41.7 arc(19.45,41.35) 19.8,41.2 48.15,41.2 arc(48.5,41.35) 48.65,41.7 48.65,47.55 arc(48.5,47.9) 48.15,48.05 19.5,48.05 arc(19.15,47.9) 19,47.55 19,41.4 arc(19.15,41.05) 19.5,40.9 48.45,40.9 arc(48.8,41.05) 48.95,41.4 48.95,47.85 arc(48.8,48.2) 48.45,48.35 19.2,48.35 arc(18.85,48.2) 18.7,47.85 18.7,41.1 arc(18.85,40.75) 19.2,40.6 48.75,40.6 arc(49.1,40.75) 49.25,41.1 49.25,48.15 arc(49.1,48.5) 48.75,48.65 18.9,48.65 arc(18.55,48.5) 18.4,48.15 18.4,40.8 arc(18.55,40.45) 18.9,40.3 49.05,40.3 arc(49.4,40.45) 49.55,40.8 49.55,48.45 arc(49.4,48.8) 49.05,48.95 18.6,48.95 arc(18.25,48.8) 18.1,48.45 18.1,40.5 arc(18.25,40.15) 18.6,40 49.35,40 arc(49.7,40.15) 49.85,40.5 49.85,48.75 arc(49.7,49.1) 49.35,49.25 18.3,49.25 arc(17.95,49.1) 17.8,48.75 17.8,40.2 arc(17.95,39.85) 18.3,39.7 49.65,39.7 arc(50,39.85) 50.15,40.2 50.15,49.05 arc(50,49.4) 49.65,49.55 18,49.55 arc(17.65,49.4) 17.5,49.05 17.5,39.9 arc(17.65,39.55) 18,39.4 49.95,39.4 arc(50.3,39.55) 50.45,39.9 50.45,49.35 arc(50.3,49.7) 49.95,49.85 17.7,49.85 arc(17.35,49.7) 17.2,49.35 17.2,39.6 arc(17.35,39.25) 17.7,39.1 50.25,39.1 arc(50.6,39.25) 50.75,39.6 50.75,49.65 arc(50.6,50) 50.25,50.15 17.4,50.15 arc(17.05,50) 16.9,49.65 16.9,39.3 arc(17.05,38.95) 17.4,38.8 50.55,38.8 arc(50.9,38.95) 51.05,39.3 51.05,49.95 arc(50.9,50.3) 50.55,50.45 17.1,50.45 arc(16.75,50.3) 16.6,49.95 16.6,39 arc(16.75,38.65) 17.1,38.5 50.85,38.5 arc(51.2,38.65) 51.35,39 51.35,50.25 arc(51.2,50.6) 50.85,50.75 16.8,50.75 arc(16.45,50.6) 16.3,50.25 16.3,38.7 arc(16.45,38.35) 16.8,38.2 51.15,38.2 arc(51.5,38.35) 51.65,38.7 51.65,50.55 arc(51.5,50.9) 51.15,51.05 16.5,51.05 arc(16.15,50.9) 16,50.55 16,38.4 arc(16.15,38.05) 16.5,37.9 51.45,37.9 arc(51.8,38.05) 51.95,38.4 51.95,50.85 arc(51.8,51.2) 51.45,51.35 16.2,51.35 arc(15.85,51.2) 15.7,50.85 15.7,38.1 arc(15.85,37.75) 16.2,37.6 51.75,37.6 arc(52.1,37.75) 52.25,38.1 52.25,51.15 arc(52.1,51.5) 51.75,51.65 15.9,51.65 arc(15.55,51.5) 15.4,51.15 15.4,37.8 arc(15.55,37.45) 15.9,37.3 52.05,37.3 arc(52.4,37.45) 52.55,37.8 52.55,51.45 arc(52.4,51.8) 52.05,51.95 15.6,51.95 arc(15.25,51.8) 15.1,51.45 15.1,37.5 arc(15.25,37.15) 15.6,37 52.35,37 arc(52.7,37.15) 52.85,37.5 52.85,51.75 arc(52.7,52.1) 52.35,52.25 15.3,52.25 arc(14.95,52.1) 14.8,51.75 14.8,37.2 arc(14.95,36.85) 15.3,36.7 52.65,36.7 arc(53,36.85) 53.15,37.2 53.15,52.05 arc(53,52.4) 52.65,52.55 15,52.55 arc(14.65,52.4) 14.5,52.05 14.5,36.9 arc(14.65,36.55) 15,36.4 52.95,36.4 arc(53.3,36.55) 53.45,36.9 53.45,52.35 arc(53.3,52.7) 52.95,52.85 14.7,52.85 arc(14.35,52.7) 14.2,52.35 14.2,36.6 arc(14.35,36.25) 14.7,36.1 53.25,36.1 arc(53.6,36.25) 53.75,36.6 53.75,52.65 arc(53.6,53) 53.25,53.15 14.4,53.15 arc(14.05,53) 13.9,52.65 13.9,36.3 arc(14.05,35.95) 14.4,35.8 53.55,35.8 arc(53.9,35.95) 54.05,36.3 54.05,52.95 arc(53.9,53.3) 53.55,53.45 14.1,53.45 arc(13.75,53.3) 13.6,52.95 13.6,36 arc(13.75,35.65) 14.1,35.5 53.85,35.5 arc(54.2,35.65) 54.35,36 54.35,53.25 arc(54.2,53.6) 53.85,53.75 13.8,53.75 arc(13.45,53.6) 13.3,53.25 13.3,35.7 arc(13.45,35.35) 13.8,35.2 54.15,35.2 arc(54.5,35.35) 54.65,35.7 54.65,53.55 arc(54.5,53.9) 54.15,54.05 13.5,54.05 arc(13.15,53.9) 13,53.55 13,35.4 arc(13.15,35.05) 13.5,34.9 54.45,34.9 arc(54.8,35.05) 54.95,35.4 54.95,53.85 arc(54.8,54.2) 54.45,54.35 13.2,54.35 arc(12.85,54.2) 12.7,53.85 12.7,35.1 arc(12.85,34.75) 13.2,34.6 54.75,34.6 arc(55.1,34.75) 55.25,35.1 55.25,54.15 arc(55.1,54.5) 54.75,54.65 12.9,54.65 arc(12.55,54.5) 12.4,54.15 12.4,34.8 arc(12.55,34.45) 12.9,34.3 55.05,34.3 arc(55.4,34.45) 55.55,34.8 55.55,54.45 arc(55.4,54.8) 55.05,54.95 12.6,54.95 arc(12.25,54.8) 12.1,54.45 12.1,34.5 arc(12.25,34.15) 12.6,34 55.35,34 arc(55.7,34.15) 55.85,34.5 55.85,54.75 arc(55.7,55.1) 55.35,55.25 12.3,55.25 arc(11.95,55.1) 11.8,54.75 11.8,34.2 arc(11.95,33.85) 12.3,33.7 55.65,33.7 arc(56,33.85) 56.15,34.2 56.15,55.05 arc(56,55.4) 55.65,55.55 12,55.55 arc(11.65,55.4) 11.5,55.05 11.5,33.9 arc(11.65,33.55) 12,33.4 55.95,33.4 arc(56.3,33.55) 56.45,33.9 56.45,55.35 arc(56.3,55.7) 55.95,55.85 11.7,55.85 arc(11.35,55.7) 11.2,55.35 11.2,33.6 arc(11.35,33.25) 11.7,33.1 56.25,33.1 arc(56.6,33.25) 56.75,33.6 56.75,55.65 arc(56.6,56) 56.25,56.15 11.4,56.15 arc(11.05,56) 10.9,55.65 10.9,33.3 arc(11.05,32.95) 11.4,32.8 56.55,32.8 arc(56.9,32.95) 57.05,33.3 57.05,55.95 arc(56.9,56.3) 56.55,56.45 10.75,56.45 arc(10.4,56.3) 10.25,55.95 v1(10.25,44.5)
N3020806: length 47.8
  LAYER2 w0.1: JOUT1.2 64.3,44.65 arc(64.13,44.54) 63.94,44.5 v1(57.75,44.5) ; JOUT1.2 65.15,45.13 arc(65.13,45.06) 65.09,44.99 64.36,44.26 arc(64.29,44.22) 64.22,44.2 58.13,44.2 arc(58.06,44.22) 57.99,44.26 v1(57.75,44.5) ; JOUT1.2 64.83,45.5 arc(64.76,45.48) 64.69,45.44 64.11,44.86 arc(64.04,44.82) 63.97,44.8 58.13,44.8 arc(58.06,44.78) 57.99,44.74 v1(57.75,44.5)
  LAYER3 w0.1: v1(57.75,44.5) 63.94,44.5 arc(64.13,44.46) 64.3,44.35 JOUT1.1 ; v1(57.75,44.5) 57.99,44.26 arc(58.06,44.22) 58.13,44.2 63.92,44.2 arc(63.99,44.18) 64.06,44.14 64.64,43.56 arc(64.71,43.52) 64.78,43.5 JOUT1.1 ; v1(57.75,44.5) 57.99,44.74 arc(58.06,44.78) 58.13,44.8 64.27,44.8 arc(64.34,44.78) 64.41,44.74 65.09,44.06 arc(65.13,43.99) 65.15,43.92 JOUT1.1
N3020818: length 20377.5
  LAYER1 w0.1: v1(22,76.5) 20.85,76.5 arc(20.64,76.59) 20.55,76.8 20.55,78.45 arc(20.64,78.66) 20.85,78.75 46.95,78.75 arc(47.16,78.66) 47.25,78.45 47.25,74.55 arc(47.16,74.34) 46.95,74.25 20.65,74.25 arc(20.44,74.34) 20.35,74.55 20.35,78.65 arc(20.44,78.86) 20.65,78.95 47.15,78.95 arc(47.36,78.86) 47.45,78.65 47.45,74.35 arc(47.36,74.14) 47.15,74.05 20.45,74.05 arc(20.24,74.14) 20.15,74.35 20.15,78.85 arc(20.24,79.06) 20.45,79.15 47.35,79.15 arc(47.56,79.06) 47.65,78.85 47.65,74.15 arc(47.56,73.94) 47.35,73.85 20.25,73.85 arc(20.04,73.94) 19.95,74.15 19.95,79.05 arc(20.04,79.26) 20.25,79.35 47.55,79.35 arc(47.76,79.26) 47.85,79.05 47.85,73.95 arc(47.76,73.74) 47.55,73.65 20.05,73.65 arc(19.84,73.74) 19.75,73.95 19.75,79.25 arc(19.84,79.46) 20.05,79.55 47.75,79.55 arc(47.96,79.46) 48.05,79.25 48.05,73.75 arc(47.96,73.54) 47.75,73.45 19.85,73.45 arc(19.64,73.54) 19.55,73.75 19.55,79.45 arc(19.64,79.66) 19.85,79.75 47.95,79.75 arc(48.16,79.66) 48.25,79.45 48.25,73.55 arc(48.16,73.34) 47.95,73.25 19.65,73.25 arc(19.44,73.34) 19.35,73.55 19.35,79.65 arc(19.44,79.86) 19.65,79.95 48.15,79.95 arc(48.36,79.86) 48.45,79.65 48.45,73.35 arc(48.36,73.14) 48.15,73.05 19.45,73.05 arc(19.24,73.14) 19.15,73.35 19.15,79.85 arc(19.24,80.06) 19.45,80.15 48.35,80.15 arc(48.56,80.06) 48.65,79.85 48.65,73.15 arc(48.56,72.94) 48.35,72.85 19.25,72.85 arc(19.04,72.94) 18.95,73.15 18.95,80.05 arc(19.04,80.26) 19.25,80.35 48.55,80.35 arc(48.76,80.26) 48.85,80.05 48.85,72.95 arc(48.76,72.74) 48.55,72.65 19.05,72.65 arc(18.84,72.74) 18.75,72.95 18.75,80.25 arc(18.84,80.46) 19.05,80.55 48.75,80.55 arc(48.96,80.46) 49.05,80.25 49.05,72.75 arc(48.96,72.54) 48.75,72.45 18.85,72.45 arc(18.64,72.54) 18.55,72.75 18.55,80.45 arc(18.64,80.66) 18.85,80.75 48.95,80.75 arc(49.16,80.66) 49.25,80.45 49.25,72.55 arc(49.16,72.34) 48.95,72.25 18.65,72.25 arc(18.44,72.34) 18.35,72.55 18.35,80.65 arc(18.44,80.86) 18.65,80.95 49.15,80.95 arc(49.36,80.86) 49.45,80.65 49.45,72.35 arc(49.36,72.14) 49.15,72.05 18.45,72.05 arc(18.24,72.14) 18.15,72.35 18.15,80.85 arc(18.24,81.06) 18.45,81.15 49.35,81.15 arc(49.56,81.06) 49.65,80.85 49.65,72.15 arc(49.56,71.94) 49.35,71.85 18.25,71.85 arc(18.04,71.94) 17.95,72.15 17.95,81.05 arc(18.04,81.26) 18.25,81.35 49.55,81.35 arc(49.76,81.26) 49.85,81.05 49.85,71.95 arc(49.76,71.74) 49.55,71.65 18.05,71.65 arc(17.84,71.74) 17.75,71.95 17.75,81.25 arc(17.84,81.46) 18.05,81.55 49.75,81.55 arc(49.96,81.46) 50.05,81.25 50.05,71.75 arc(49.96,71.54) 49.75,71.45 17.85,71.45 arc(17.64,71.54) 17.55,71.75 17.55,81.45 arc(17.64,81.66) 17.85,81.75 49.95,81.75 arc(50.16,81.66) 50.25,81.45 50.25,71.55 arc(50.16,71.34) 49.95,71.25 17.65,71.25 arc(17.44,71.34) 17.35,71.55 17.35,81.65 arc(17.44,81.86) 17.65,81.95 50.15,81.95 arc(50.36,81.86) 50.45,81.65 50.45,71.35 arc(50.36,71.14) 50.15,71.05 17.45,71.05 arc(17.24,71.14) 17.15,71.35 17.15,81.85 arc(17.24,82.06) 17.45,82.15 50.35,82.15 arc(50.56,82.06) 50.65,81.85 50.65,71.15 arc(50.56,70.94) 50.35,70.85 17.25,70.85 arc(17.04,70.94) 16.95,71.15 16.95,82.05 arc(17.04,82.26) 17.25,82.35 50.55,82.35 arc(50.76,82.26) 50.85,82.05 50.85,70.95 arc(50.76,70.74) 50.55,70.65 17.05,70.65 arc(16.84,70.74) 16.75,70.95 16.75,82.25 arc(16.84,82.46) 17.05,82.55 50.75,82.55 arc(50.96,82.46) 51.05,82.25 51.05,70.75 arc(50.96,70.54) 50.75,70.45 16.85,70.45 arc(16.64,70.54) 16.55,70.75 16.55,82.45 arc(16.64,82.66) 16.85,82.75 50.95,82.75 arc(51.16,82.66) 51.25,82.45 51.25,70.55 arc(51.16,70.34) 50.95,70.25 16.65,70.25 arc(16.44,70.34) 16.35,70.55 16.35,82.65 arc(16.44,82.86) 16.65,82.95 51.15,82.95 arc(51.36,82.86) 51.45,82.65 51.45,70.35 arc(51.36,70.14) 51.15,70.05 16.45,70.05 arc(16.24,70.14) 16.15,70.35 16.15,82.85 arc(16.24,83.06) 16.45,83.15 51.35,83.15 arc(51.56,83.06) 51.65,82.85 51.65,70.15 arc(51.56,69.94) 51.35,69.85 16.25,69.85 arc(16.04,69.94) 15.95,70.15 15.95,83.05 arc(16.04,83.26) 16.25,83.35 51.55,83.35 arc(51.76,83.26) 51.85,83.05 51.85,69.95 arc(51.76,69.74) 51.55,69.65 16.05,69.65 arc(15.84,69.74) 15.75,69.95 15.75,83.25 arc(15.84,83.46) 16.05,83.55 51.75,83.55 arc(51.96,83.46) 52.05,83.25 52.05,69.75 arc(51.96,69.54) 51.75,69.45 15.85,69.45 arc(15.64,69.54) 15.55,69.75 15.55,83.45 arc(15.64,83.66) 15.85,83.75 51.95,83.75 arc(52.16,83.66) 52.25,83.45 52.25,69.55 arc(52.16,69.34) 51.95,69.25 15.65,69.25 arc(15.44,69.34) 15.35,69.55 15.35,83.65 arc(15.44,83.86) 15.65,83.95 52.15,83.95 arc(52.36,83.86) 52.45,83.65 52.45,69.35 arc(52.36,69.14) 52.15,69.05 15.45,69.05 arc(15.24,69.14) 15.15,69.35 15.15,83.85 arc(15.24,84.06) 15.45,84.15 52.35,84.15 arc(52.56,84.06) 52.65,83.85 52.65,69.15 arc(52.56,68.94) 52.35,68.85 15.25,68.85 arc(15.04,68.94) 14.95,69.15 14.95,84.05 arc(15.04,84.26) 15.25,84.35 52.55,84.35 arc(52.76,84.26) 52.85,84.05 52.85,68.95 arc(52.76,68.74) 52.55,68.65 15.05,68.65 arc(14.84,68.74) 14.75,68.95 14.75,84.25 arc(14.84,84.46) 15.05,84.55 52.75,84.55 arc(52.96,84.46) 53.05,84.25 53.05,68.75 arc(52.96,68.54) 52.75,68.45 14.85,68.45 arc(14.64,68.54) 14.55,68.75 14.55,84.45 arc(14.64,84.66) 14.85,84.75 52.95,84.75 arc(53.16,84.66) 53.25,84.45 53.25,68.55 arc(53.16,68.34) 52.95,68.25 14.65,68.25 arc(14.44,68.34) 14.35,68.55 14.35,84.65 arc(14.44,84.86) 14.65,84.95 53.15,84.95 arc(53.36,84.86) 53.45,84.65 53.45,68.35 arc(53.36,68.14) 53.15,68.05 14.45,68.05 arc(14.24,68.14) 14.15,68.35 14.15,84.85 arc(14.24,85.06) 14.45,85.15 53.35,85.15 arc(53.56,85.06) 53.65,84.85 53.65,68.15 arc(53.56,67.94) 53.35,67.85 14.25,67.85 arc(14.04,67.94) 13.95,68.15 13.95,85.05 arc(14.04,85.26) 14.25,85.35 53.55,85.35 arc(53.76,85.26) 53.85,85.05 53.85,67.95 arc(53.76,67.74) 53.55,67.65 14.05,67.65 arc(13.84,67.74) 13.75,67.95 13.75,85.25 arc(13.84,85.46) 14.05,85.55 53.75,85.55 arc(53.96,85.46) 54.05,85.25 54.05,67.75 arc(53.96,67.54) 53.75,67.45 13.85,67.45 arc(13.64,67.54) 13.55,67.75 13.55,85.45 arc(13.64,85.66) 13.85,85.75 53.95,85.75 arc(54.16,85.66) 54.25,85.45 54.25,67.55 arc(54.16,67.34) 53.95,67.25 13.65,67.25 arc(13.44,67.34) 13.35,67.55 13.35,85.65 arc(13.44,85.86) 13.65,85.95 54.15,85.95 arc(54.36,85.86) 54.45,85.65 54.45,67.35 arc(54.36,67.14) 54.15,67.05 13.45,67.05 arc(13.24,67.14) 13.15,67.35 13.15,85.85 arc(13.24,86.06) 13.45,86.15 54.35,86.15 arc(54.56,86.06) 54.65,85.85 54.65,67.15 arc(54.56,66.94) 54.35,66.85 13.25,66.85 arc(13.04,66.94) 12.95,67.15 12.95,86.05 arc(13.04,86.26) 13.25,86.35 54.55,86.35 arc(54.76,86.26) 54.85,86.05 54.85,66.95 arc(54.76,66.74) 54.55,66.65 13.05,66.65 arc(12.84,66.74) 12.75,66.95 12.75,86.25 arc(12.84,86.46) 13.05,86.55 54.75,86.55 arc(54.96,86.46) 55.05,86.25 55.05,66.75 arc(54.96,66.54) 54.75,66.45 12.85,66.45 arc(12.64,66.54) 12.55,66.75 12.55,86.45 arc(12.64,86.66) 12.85,86.75 54.95,86.75 arc(55.16,86.66) 55.25,86.45 55.25,66.55 arc(55.16,66.34) 54.95,66.25 12.65,66.25 arc(12.44,66.34) 12.35,66.55 12.35,86.65 arc(12.44,86.86) 12.65,86.95 55.15,86.95 arc(55.36,86.86) 55.45,86.65 55.45,66.35 arc(55.36,66.14) 55.15,66.05 12.45,66.05 arc(12.24,66.14) 12.15,66.35 12.15,86.85 arc(12.24,87.06) 12.45,87.15 55.35,87.15 arc(55.56,87.06) 55.65,86.85 55.65,66.15 arc(55.56,65.94) 55.35,65.85 12.25,65.85 arc(12.04,65.94) 11.95,66.15 11.95,87.05 arc(12.04,87.26) 12.25,87.35 55.55,87.35 arc(55.76,87.26) 55.85,87.05 55.85,65.95 arc(55.76,65.74) 55.55,65.65 12.05,65.65 arc(11.84,65.74) 11.75,65.95 11.75,87.25 arc(11.84,87.46) 12.05,87.55 55.75,87.55 arc(55.96,87.46) 56.05,87.25 56.05,65.75 arc(55.96,65.54) 55.75,65.45 11.85,65.45 arc(11.64,65.54) 11.55,65.75 11.55,87.45 arc(11.64,87.66) 11.85,87.75 55.95,87.75 arc(56.16,87.66) 56.25,87.45 56.25,65.55 arc(56.16,65.34) 55.95,65.25 11.65,65.25 arc(11.44,65.34) 11.35,65.55 11.35,87.65 arc(11.44,87.86) 11.65,87.95 56.15,87.95 arc(56.36,87.86) 56.45,87.65 56.45,65.35 arc(56.36,65.14) 56.15,65.05 11.45,65.05 arc(11.24,65.14) 11.15,65.35 11.15,87.85 arc(11.24,88.06) 11.45,88.15 56.35,88.15 arc(56.56,88.06) 56.65,87.85 56.65,65.15 arc(56.56,64.94) 56.35,64.85 11.25,64.85 arc(11.04,64.94) 10.95,65.15 10.95,88.05 arc(11.04,88.26) 11.25,88.35 56.55,88.35 arc(56.76,88.26) 56.85,88.05 56.85,64.95 arc(56.76,64.74) 56.55,64.65 11.05,64.65 arc(10.84,64.74) 10.75,64.95 10.75,88.25 arc(10.84,88.46) 11.05,88.55 56.75,88.55 arc(56.96,88.46) 57.05,88.25 57.05,64.75 arc(56.96,64.54) 56.75,64.45 10.85,64.45 arc(10.43,64.63) 10.25,65.05 v1(10.25,76.5)
  LAYER2 w0.1: JOUT4.1 3.03,77.5 arc(3.14,77.48) 3.24,77.41 4.06,76.59 arc(4.16,76.52) 4.27,76.5 9.03,76.5 arc(9.14,76.52) 9.24,76.59 10.16,77.51 arc(10.23,77.61) 10.25,77.72 10.25,87.95 arc(10.46,88.44) 10.95,88.65 56.85,88.65 arc(57.06,88.56) 57.15,88.35 57.15,64.65 arc(57.06,64.44) 56.85,64.35 11.15,64.35 arc(10.94,64.44) 10.85,64.65 10.85,88.15 arc(10.94,88.36) 11.15,88.45 56.65,88.45 arc(56.86,88.36) 56.95,88.15 56.95,64.85 arc(56.86,64.64) 56.65,64.55 11.35,64.55 arc(11.14,64.64) 11.05,64.85 11.05,87.95 arc(11.14,88.16) 11.35,88.25 56.45,88.25 arc(56.66,88.16) 56.75,87.95 56.75,65.05 arc(56.66,64.84) 56.45,64.75 11.55,64.75 arc(11.34,64.84) 11.25,65.05 11.25,87.75 arc(11.34,87.96) 11.55,88.05 56.25,88.05 arc(56.46,87.96) 56.55,87.75 56.55,65.25 arc(56.46,65.04) 56.25,64.95 11.75,64.95 arc(11.54,65.04) 11.45,65.25 11.45,87.55 arc(11.54,87.76) 11.75,87.85 56.05,87.85 arc(56.26,87.76) 56.35,87.55 56.35,65.45 arc(56.26,65.24) 56.05,65.15 11.95,65.15 arc(11.74,65.24) 11.65,65.45 11.65,87.35 arc(11.74,87.56) 11.95,87.65 55.85,87.65 arc(56.06,87.56) 56.15,87.35 56.15,65.65 arc(56.06,65.44) 55.85,65.35 12.15,65.35 arc(11.94,65.44) 11.85,65.65 11.85,87.15 arc(11.94,87.36) 12.15,87.45 55.65,87.45 arc(55.86,87.36) 55.95,87.15 55.95,65.85 arc(55.86,65.64) 55.65,65.55 12.35,65.55 arc(12.14,65.64) 12.05,65.85 12.05,86.95 arc(12.14,87.16) 12.35,87.25 55.45,87.25 arc(55.66,87.16) 55.75,86.95 55.75,66.05 arc(55.66,65.84) 55.45,65.75 12.55,65.75 arc(12.34,65.84) 12.25,66.05 12.25,86.75 arc(12.34,86.96) 12.55,87.05 55.25,87.05 arc(55.46,86.96) 55.55,86.75 55.55,66.25 arc(55.46,66.04) 55.25,65.95 12.75,65.95 arc(12.54,66.04) 12.45,66.25 12.45,86.55 arc(12.54,86.76) 12.75,86.85 55.05,86.85 arc(55.26,86.76) 55.35,86.55 55.35,66.45 arc(55.26,66.24) 55.05,66.15 12.95,66.15 arc(12.74,66.24) 12.65,66.45 12.65,86.35 arc(12.74,86.56) 12.95,86.65 54.85,86.65 arc(55.06,86.56) 55.15,86.35 55.15,66.65 arc(55.06,66.44) 54.85,66.35 13.15,66.35 arc(12.94,66.44) 12.85,66.65 12.85,86.15 arc(12.94,86.36) 13.15,86.45 54.65,86.45 arc(54.86,86.36) 54.95,86.15 54.95,66.85 arc(54.86,66.64) 54.65,66.55 13.35,66.55 arc(13.14,66.64) 13.05,66.85 13.05,85.95 arc(13.14,86.16) 13.35,86.25 54.45,86.25 arc(54.66,86.16) 54.75,85.95 54.75,67.05 arc(54.66,66.84) 54.45,66.75 13.55,66.75 arc(13.34,66.84) 13.25,67.05 13.25,85.75 arc(13.34,85.96) 13.55,86.05 54.25,86.05 arc(54.46,85.96) 54.55,85.75 54.55,67.25 arc(54.46,67.04) 54.25,66.95 13.75,66.95 arc(13.54,67.04) 13.45,67.25 13.45,85.55 arc(13.54,85.76) 13.75,85.85 54.05,85.85 arc(54.26,85.76) 54.35,85.55 54.35,67.45 arc(54.26,67.24) 54.05,67.15 13.95,67.15 arc(13.74,67.24) 13.65,67.45 13.65,85.35 arc(13.74,85.56) 13.95,85.65 53.85,85.65 arc(54.06,85.56) 54.15,85.35 54.15,67.65 arc(54.06,67.44) 53.85,67.35 14.15,67.35 arc(13.94,67.44) 13.85,67.65 13.85,85.15 arc(13.94,85.36) 14.15,85.45 53.65,85.45 arc(53.86,85.36) 53.95,85.15 53.95,67.85 arc(53.86,67.64) 53.65,67.55 14.35,67.55 arc(14.14,67.64) 14.05,67.85 14.05,84.95 arc(14.14,85.16) 14.35,85.25 53.45,85.25 arc(53.66,85.16) 53.75,84.95 53.75,68.05 arc(53.66,67.84) 53.45,67.75 14.55,67.75 arc(14.34,67.84) 14.25,68.05 14.25,84.75 arc(14.34,84.96) 14.55,85.05 53.25,85.05 arc(53.46,84.96) 53.55,84.75 53.55,68.25 arc(53.46,68.04) 53.25,67.95 14.75,67.95 arc(14.54,68.04) 14.45,68.25 14.45,84.55 arc(14.54,84.76) 14.75,84.85 53.05,84.85 arc(53.26,84.76) 53.35,84.55 53.35,68.45 arc(53.26,68.24) 53.05,68.15 14.95,68.15 arc(14.74,68.24) 14.65,68.45 14.65,84.35 arc(14.74,84.56) 14.95,84.65 52.85,84.65 arc(53.06,84.56) 53.15,84.35 53.15,68.65 arc(53.06,68.44) 52.85,68.35 15.15,68.35 arc(14.94,68.44) 14.85,68.65 14.85,84.15 arc(14.94,84.36) 15.15,84.45 52.65,84.45 arc(52.86,84.36) 52.95,84.15 52.95,68.85 arc(52.86,68.64) 52.65,68.55 15.35,68.55 arc(15.14,68.64) 15.05,68.85 15.05,83.95 arc(15.14,84.16) 15.35,84.25 52.45,84.25 arc(52.66,84.16) 52.75,83.95 52.75,69.05 arc(52.66,68.84) 52.45,68.75 15.55,68.75 arc(15.34,68.84) 15.25,69.05 15.25,83.75 arc(15.34,83.96) 15.55,84.05 52.25,84.05 arc(52.46,83.96) 52.55,83.75 52.55,69.25 arc(52.46,69.04) 52.25,68.95 15.75,68.95 arc(15.54,69.04) 15.45,69.25 15.45,83.55 arc(15.54,83.76) 15.75,83.85 52.05,83.85 arc(52.26,83.76) 52.35,83.55 52.35,69.45 arc(52.26,69.24) 52.05,69.15 15.95,69.15 arc(15.74,69.24) 15.65,69.45 15.65,83.35 arc(15.74,83.56) 15.95,83.65 51.85,83.65 arc(52.06,83.56) 52.15,83.35 52.15,69.65 arc(52.06,69.44) 51.85,69.35 16.15,69.35 arc(15.94,69.44) 15.85,69.65 15.85,83.15 arc(15.94,83.36) 16.15,83.45 51.65,83.45 arc(51.86,83.36) 51.95,83.15 51.95,69.85 arc(51.86,69.64) 51.65,69.55 16.35,69.55 arc(16.14,69.64) 16.05,69.85 16.05,82.95 arc(16.14,83.16) 16.35,83.25 51.45,83.25 arc(51.66,83.16) 51.75,82.95 51.75,70.05 arc(51.66,69.84) 51.45,69.75 16.55,69.75 arc(16.34,69.84) 16.25,70.05 16.25,82.75 arc(16.34,82.96) 16.55,83.05 51.25,83.05 arc(51.46,82.96) 51.55,82.75 51.55,70.25 arc(51.46,70.04) 51.25,69.95 16.75,69.95 arc(16.54,70.04) 16.45,70.25 16.45,82.55 arc(16.54,82.76) 16.75,82.85 51.05,82.85 arc(51.26,82.76) 51.35,82.55 51.35,70.45 arc(51.26,70.24) 51.05,70.15 16.95,70.15 arc(16.74,70.24) 16.65,70.45 16.65,82.35 arc(16.74,82.56) 16.95,82.65 50.85,82.65 arc(51.06,82.56) 51.15,82.35 51.15,70.65 arc(51.06,70.44) 50.85,70.35 17.15,70.35 arc(16.94,70.44) 16.85,70.65 16.85,82.15 arc(16.94,82.36) 17.15,82.45 50.65,82.45 arc(50.86,82.36) 50.95,82.15 50.95,70.85 arc(50.86,70.64) 50.65,70.55 17.35,70.55 arc(17.14,70.64) 17.05,70.85 17.05,81.95 arc(17.14,82.16) 17.35,82.25 50.45,82.25 arc(50.66,82.16) 50.75,81.95 50.75,71.05 arc(50.66,70.84) 50.45,70.75 17.55,70.75 arc(17.34,70.84) 17.25,71.05 17.25,81.75 arc(17.34,81.96) 17.55,82.05 50.25,82.05 arc(50.46,81.96) 50.55,81.75 50.55,71.25 arc(50.46,71.04) 50.25,70.95 17.75,70.95 arc(17.54,71.04) 17.45,71.25 17.45,81.55 arc(17.54,81.76) 17.75,81.85 50.05,81.85 arc(50.26,81.76) 50.35,81.55 50.35,71.45 arc(50.26,71.24) 50.05,71.15 17.95,71.15 arc(17.74,71.24) 17.65,71.45 17.65,81.35 arc(17.74,81.56) 17.95,81.65 49.85,81.65 arc(50.06,81.56) 50.15,81.35 50.15,71.65 arc(50.06,71.44) 49.85,71.35 18.15,71.35 arc(17.94,71.44) 17.85,71.65 17.85,81.15 arc(17.94,81.36) 18.15,81.45 49.65,81.45 arc(49.86,81.36) 49.95,81.15 49.95,71.85 arc(49.86,71.64) 49.65,71.55 18.35,71.55 arc(18.14,71.64) 18.05,71.85 18.05,80.95 arc(18.14,81.16) 18.35,81.25 49.45,81.25 arc(49.66,81.16) 49.75,80.95 49.75,72.05 arc(49.66,71.84) 49.45,71.75 18.55,71.75 arc(18.34,71.84) 18.25,72.05 18.25,80.75 arc(18.34,80.96) 18.55,81.05 49.25,81.05 arc(49.46,80.96) 49.55,80.75 49.55,72.25 arc(49.46,72.04) 49.25,71.95 18.75,71.95 arc(18.54,72.04) 18.45,72.25 18.45,80.55 arc(18.54,80.76) 18.75,80.85 49.05,80.85 arc(49.26,80.76) 49.35,80.55 49.35,72.45 arc(49.26,72.24) 49.05,72.15 18.95,72.15 arc(18.74,72.24) 18.65,72.45 18.65,80.35 arc(18.74,80.56) 18.95,80.65 48.85,80.65 arc(49.06,80.56) 49.15,80.35 49.15,72.65 arc(49.06,72.44) 48.85,72.35 19.15,72.35 arc(18.94,72.44) 18.85,72.65 18.85,80.15 arc(18.94,80.36) 19.15,80.45 48.65,80.45 arc(48.86,80.36) 48.95,80.15 48.95,72.85 arc(48.86,72.64) 48.65,72.55 19.35,72.55 arc(19.14,72.64) 19.05,72.85 19.05,79.95 arc(19.14,80.16) 19.35,80.25 48.45,80.25 arc(48.66,80.16) 48.75,79.95 48.75,73.05 arc(48.66,72.84) 48.45,72.75 19.55,72.75 arc(19.34,72.84) 19.25,73.05 19.25,79.75 arc(19.34,79.96) 19.55,80.05 48.25,80.05 arc(48.46,79.96) 48.55,79.75 48.55,73.25 arc(48.46,73.04) 48.25,72.95 19.75,72.95 arc(19.54,73.04) 19.45,73.25 19.45,79.55 arc(19.54,79.76) 19.75,79.85 48.05,79.85 arc(48.26,79.76) 48.35,79.55 48.35,73.45 arc(48.26,73.24) 48.05,73.15 19.95,73.15 arc(19.74,73.24) 19.65,73.45 19.65,79.35 arc(19.74,79.56) 19.95,79.65 47.85,79.65 arc(48.06,79.56) 48.15,79.35 48.15,73.65 arc(48.06,73.44) 47.85,73.35 20.15,73.35 arc(19.94,73.44) 19.85,73.65 19.85,79.15 arc(19.94,79.36) 20.15,79.45 47.65,79.45 arc(47.86,79.36) 47.95,79.15 47.95,73.85 arc(47.86,73.64) 47.65,73.55 20.35,73.55 arc(20.14,73.64) 20.05,73.85 20.05,78.95 arc(20.14,79.16) 20.35,79.25 47.45,79.25 arc(47.66,79.16) 47.75,78.95 47.75,74.05 arc(47.66,73.84) 47.45,73.75 20.55,73.75 arc(20.34,73.84) 20.25,74.05 20.25,78.75 arc(20.34,78.96) 20.55,79.05 47.25,79.05 arc(47.46,78.96) 47.55,78.75 47.55,74.25 arc(47.46,74.04) 47.25,73.95 20.75,73.95 arc(20.54,74.04) 20.45,74.25 20.45,78.55 arc(20.54,78.76) 20.75,78.85 47.05,78.85 arc(47.26,78.76) 47.35,78.55 47.35,74.45 arc(47.26,74.24) 47.05,74.15 20.95,74.15 arc(20.74,74.24) 20.65,74.45 20.65,76.2 arc(20.74,76.41) 20.95,76.5 v1(22,76.5)
  LAYER3 w0.1: v1(46,76.5) 46.75,76.5 arc(46.96,76.41) 47.05,76.2 47.05,74.75 arc(46.96,74.54) 46.75,74.45 20.85,74.45 arc(20.64,74.54) 20.55,74.75 20.55,78.45 arc(20.64,78.66) 20.85,78.75 46.95,78.75 arc(47.16,78.66) 47.25,78.45 47.25,74.55 arc(47.16,74.34) 46.95,74.25 20.65,74.25 arc(20.44,74.34) 20.35,74.55 20.35,78.65 arc(20.44,78.86) 20.65,78.95 47.15,78.95 arc(47.36,78.86) 47.45,78.65 47.45,74.35 arc(47.36,74.14) 47.15,74.05 20.45,74.05 arc(20.24,74.14) 20.15,74.35 20.15,78.85 arc(20.24,79.06) 20.45,79.15 47.35,79.15 arc(47.56,79.06) 47.65,78.85 47.65,74.15 arc(47.56,73.94) 47.35,73.85 20.25,73.85 arc(20.04,73.94) 19.95,74.15 19.95,79.05 arc(20.04,79.26) 20.25,79.35 47.55,79.35 arc(47.76,79.26) 47.85,79.05 47.85,73.95 arc(47.76,73.74) 47.55,73.65 20.05,73.65 arc(19.84,73.74) 19.75,73.95 19.75,79.25 arc(19.84,79.46) 20.05,79.55 47.75,79.55 arc(47.96,79.46) 48.05,79.25 48.05,73.75 arc(47.96,73.54) 47.75,73.45 19.85,73.45 arc(19.64,73.54) 19.55,73.75 19.55,79.45 arc(19.64,79.66) 19.85,79.75 47.95,79.75 arc(48.16,79.66) 48.25,79.45 48.25,73.55 arc(48.16,73.34) 47.95,73.25 19.65,73.25 arc(19.44,73.34) 19.35,73.55 19.35,79.65 arc(19.44,79.86) 19.65,79.95 48.15,79.95 arc(48.36,79.86) 48.45,79.65 48.45,73.35 arc(48.36,73.14) 48.15,73.05 19.45,73.05 arc(19.24,73.14) 19.15,73.35 19.15,79.85 arc(19.24,80.06) 19.45,80.15 48.35,80.15 arc(48.56,80.06) 48.65,79.85 48.65,73.15 arc(48.56,72.94) 48.35,72.85 19.25,72.85 arc(19.04,72.94) 18.95,73.15 18.95,80.05 arc(19.04,80.26) 19.25,80.35 48.55,80.35 arc(48.76,80.26) 48.85,80.05 48.85,72.95 arc(48.76,72.74) 48.55,72.65 19.05,72.65 arc(18.84,72.74) 18.75,72.95 18.75,80.25 arc(18.84,80.46) 19.05,80.55 48.75,80.55 arc(48.96,80.46) 49.05,80.25 49.05,72.75 arc(48.96,72.54) 48.75,72.45 18.85,72.45 arc(18.64,72.54) 18.55,72.75 18.55,80.45 arc(18.64,80.66) 18.85,80.75 48.95,80.75 arc(49.16,80.66) 49.25,80.45 49.25,72.55 arc(49.16,72.34) 48.95,72.25 18.65,72.25 arc(18.44,72.34) 18.35,72.55 18.35,80.65 arc(18.44,80.86) 18.65,80.95 49.15,80.95 arc(49.36,80.86) 49.45,80.65 49.45,72.35 arc(49.36,72.14) 49.15,72.05 18.45,72.05 arc(18.24,72.14) 18.15,72.35 18.15,80.85 arc(18.24,81.06) 18.45,81.15 49.35,81.15 arc(49.56,81.06) 49.65,80.85 49.65,72.15 arc(49.56,71.94) 49.35,71.85 18.25,71.85 arc(18.04,71.94) 17.95,72.15 17.95,81.05 arc(18.04,81.26) 18.25,81.35 49.55,81.35 arc(49.76,81.26) 49.85,81.05 49.85,71.95 arc(49.76,71.74) 49.55,71.65 18.05,71.65 arc(17.84,71.74) 17.75,71.95 17.75,81.25 arc(17.84,81.46) 18.05,81.55 49.75,81.55 arc(49.96,81.46) 50.05,81.25 50.05,71.75 arc(49.96,71.54) 49.75,71.45 17.85,71.45 arc(17.64,71.54) 17.55,71.75 17.55,81.45 arc(17.64,81.66) 17.85,81.75 49.95,81.75 arc(50.16,81.66) 50.25,81.45 50.25,71.55 arc(50.16,71.34) 49.95,71.25 17.65,71.25 arc(17.44,71.34) 17.35,71.55 17.35,81.65 arc(17.44,81.86) 17.65,81.95 50.15,81.95 arc(50.36,81.86) 50.45,81.65 50.45,71.35 arc(50.36,71.14) 50.15,71.05 17.45,71.05 arc(17.24,71.14) 17.15,71.35 17.15,81.85 arc(17.24,82.06) 17.45,82.15 50.35,82.15 arc(50.56,82.06) 50.65,81.85 50.65,71.15 arc(50.56,70.94) 50.35,70.85 17.25,70.85 arc(17.04,70.94) 16.95,71.15 16.95,82.05 arc(17.04,82.26) 17.25,82.35 50.55,82.35 arc(50.76,82.26) 50.85,82.05 50.85,70.95 arc(50.76,70.74) 50.55,70.65 17.05,70.65 arc(16.84,70.74) 16.75,70.95 16.75,82.25 arc(16.84,82.46) 17.05,82.55 50.75,82.55 arc(50.96,82.46) 51.05,82.25 51.05,70.75 arc(50.96,70.54) 50.75,70.45 16.85,70.45 arc(16.64,70.54) 16.55,70.75 16.55,82.45 arc(16.64,82.66) 16.85,82.75 50.95,82.75 arc(51.16,82.66) 51.25,82.45 51.25,70.55 arc(51.16,70.34) 50.95,70.25 16.65,70.25 arc(16.44,70.34) 16.35,70.55 16.35,82.65 arc(16.44,82.86) 16.65,82.95 51.15,82.95 arc(51.36,82.86) 51.45,82.65 51.45,70.35 arc(51.36,70.14) 51.15,70.05 16.45,70.05 arc(16.24,70.14) 16.15,70.35 16.15,82.85 arc(16.24,83.06) 16.45,83.15 51.35,83.15 arc(51.56,83.06) 51.65,82.85 51.65,70.15 arc(51.56,69.94) 51.35,69.85 16.25,69.85 arc(16.04,69.94) 15.95,70.15 15.95,83.05 arc(16.04,83.26) 16.25,83.35 51.55,83.35 arc(51.76,83.26) 51.85,83.05 51.85,69.95 arc(51.76,69.74) 51.55,69.65 16.05,69.65 arc(15.84,69.74) 15.75,69.95 15.75,83.25 arc(15.84,83.46) 16.05,83.55 51.75,83.55 arc(51.96,83.46) 52.05,83.25 52.05,69.75 arc(51.96,69.54) 51.75,69.45 15.85,69.45 arc(15.64,69.54) 15.55,69.75 15.55,83.45 arc(15.64,83.66) 15.85,83.75 51.95,83.75 arc(52.16,83.66) 52.25,83.45 52.25,69.55 arc(52.16,69.34) 51.95,69.25 15.65,69.25 arc(15.44,69.34) 15.35,69.55 15.35,83.65 arc(15.44,83.86) 15.65,83.95 52.15,83.95 arc(52.36,83.86) 52.45,83.65 52.45,69.35 arc(52.36,69.14) 52.15,69.05 15.45,69.05 arc(15.24,69.14) 15.15,69.35 15.15,83.85 arc(15.24,84.06) 15.45,84.15 52.35,84.15 arc(52.56,84.06) 52.65,83.85 52.65,69.15 arc(52.56,68.94) 52.35,68.85 15.25,68.85 arc(15.04,68.94) 14.95,69.15 14.95,84.05 arc(15.04,84.26) 15.25,84.35 52.55,84.35 arc(52.76,84.26) 52.85,84.05 52.85,68.95 arc(52.76,68.74) 52.55,68.65 15.05,68.65 arc(14.84,68.74) 14.75,68.95 14.75,84.25 arc(14.84,84.46) 15.05,84.55 52.75,84.55 arc(52.96,84.46) 53.05,84.25 53.05,68.75 arc(52.96,68.54) 52.75,68.45 14.85,68.45 arc(14.64,68.54) 14.55,68.75 14.55,84.45 arc(14.64,84.66) 14.85,84.75 52.95,84.75 arc(53.16,84.66) 53.25,84.45 53.25,68.55 arc(53.16,68.34) 52.95,68.25 14.65,68.25 arc(14.44,68.34) 14.35,68.55 14.35,84.65 arc(14.44,84.86) 14.65,84.95 53.15,84.95 arc(53.36,84.86) 53.45,84.65 53.45,68.35 arc(53.36,68.14) 53.15,68.05 14.45,68.05 arc(14.24,68.14) 14.15,68.35 14.15,84.85 arc(14.24,85.06) 14.45,85.15 53.35,85.15 arc(53.56,85.06) 53.65,84.85 53.65,68.15 arc(53.56,67.94) 53.35,67.85 14.25,67.85 arc(14.04,67.94) 13.95,68.15 13.95,85.05 arc(14.04,85.26) 14.25,85.35 53.55,85.35 arc(53.76,85.26) 53.85,85.05 53.85,67.95 arc(53.76,67.74) 53.55,67.65 14.05,67.65 arc(13.84,67.74) 13.75,67.95 13.75,85.25 arc(13.84,85.46) 14.05,85.55 53.75,85.55 arc(53.96,85.46) 54.05,85.25 54.05,67.75 arc(53.96,67.54) 53.75,67.45 13.85,67.45 arc(13.64,67.54) 13.55,67.75 13.55,85.45 arc(13.64,85.66) 13.85,85.75 53.95,85.75 arc(54.16,85.66) 54.25,85.45 54.25,67.55 arc(54.16,67.34) 53.95,67.25 13.65,67.25 arc(13.44,67.34) 13.35,67.55 13.35,85.65 arc(13.44,85.86) 13.65,85.95 54.15,85.95 arc(54.36,85.86) 54.45,85.65 54.45,67.35 arc(54.36,67.14) 54.15,67.05 13.45,67.05 arc(13.24,67.14) 13.15,67.35 13.15,85.85 arc(13.24,86.06) 13.45,86.15 54.35,86.15 arc(54.56,86.06) 54.65,85.85 54.65,67.15 arc(54.56,66.94) 54.35,66.85 13.25,66.85 arc(13.04,66.94) 12.95,67.15 12.95,86.05 arc(13.04,86.26) 13.25,86.35 54.55,86.35 arc(54.76,86.26) 54.85,86.05 54.85,66.95 arc(54.76,66.74) 54.55,66.65 13.05,66.65 arc(12.84,66.74) 12.75,66.95 12.75,86.25 arc(12.84,86.46) 13.05,86.55 54.75,86.55 arc(54.96,86.46) 55.05,86.25 55.05,66.75 arc(54.96,66.54) 54.75,66.45 12.85,66.45 arc(12.64,66.54) 12.55,66.75 12.55,86.45 arc(12.64,86.66) 12.85,86.75 54.95,86.75 arc(55.16,86.66) 55.25,86.45 55.25,66.55 arc(55.16,66.34) 54.95,66.25 12.65,66.25 arc(12.44,66.34) 12.35,66.55 12.35,86.65 arc(12.44,86.86) 12.65,86.95 55.15,86.95 arc(55.36,86.86) 55.45,86.65 55.45,66.35 arc(55.36,66.14) 55.15,66.05 12.45,66.05 arc(12.24,66.14) 12.15,66.35 12.15,86.85 arc(12.24,87.06) 12.45,87.15 55.35,87.15 arc(55.56,87.06) 55.65,86.85 55.65,66.15 arc(55.56,65.94) 55.35,65.85 12.25,65.85 arc(12.04,65.94) 11.95,66.15 11.95,87.05 arc(12.04,87.26) 12.25,87.35 55.55,87.35 arc(55.76,87.26) 55.85,87.05 55.85,65.95 arc(55.76,65.74) 55.55,65.65 12.05,65.65 arc(11.84,65.74) 11.75,65.95 11.75,87.25 arc(11.84,87.46) 12.05,87.55 55.75,87.55 arc(55.96,87.46) 56.05,87.25 56.05,65.75 arc(55.96,65.54) 55.75,65.45 11.85,65.45 arc(11.64,65.54) 11.55,65.75 11.55,87.45 arc(11.64,87.66) 11.85,87.75 55.95,87.75 arc(56.16,87.66) 56.25,87.45 56.25,65.55 arc(56.16,65.34) 55.95,65.25 11.65,65.25 arc(11.44,65.34) 11.35,65.55 11.35,87.65 arc(11.44,87.86) 11.65,87.95 56.15,87.95 arc(56.36,87.86) 56.45,87.65 56.45,65.35 arc(56.36,65.14) 56.15,65.05 11.45,65.05 arc(11.24,65.14) 11.15,65.35 11.15,87.85 arc(11.24,88.06) 11.45,88.15 56.35,88.15 arc(56.56,88.06) 56.65,87.85 56.65,65.15 arc(56.56,64.94) 56.35,64.85 11.25,64.85 arc(11.04,64.94) 10.95,65.15 10.95,88.05 arc(11.04,88.26) 11.25,88.35 56.55,88.35 arc(56.76,88.26) 56.85,88.05 56.85,64.95 arc(56.76,64.74) 56.55,64.65 11.05,64.65 arc(10.84,64.74) 10.75,64.95 10.75,88.25 arc(10.84,88.46) 11.05,88.55 56.75,88.55 arc(56.96,88.46) 57.05,88.25 57.05,64.75 arc(56.96,64.54) 56.75,64.45 10.85,64.45 arc(10.43,64.63) 10.25,65.05 10.25,75.38 arc(10.23,75.49) 10.16,75.59 9.34,76.41 arc(9.24,76.48) 9.13,76.5 4.22,76.5 arc(4.11,76.48) 4.01,76.41 3.19,75.59 arc(3.09,75.52) 2.98,75.5 JOUT4.2
  LAYER4 w0.1: v1(10.25,76.5) 10.25,87.95 arc(10.46,88.44) 10.95,88.65 56.85,88.65 arc(57.06,88.56) 57.15,88.35 57.15,64.65 arc(57.06,64.44) 56.85,64.35 11.15,64.35 arc(10.94,64.44) 10.85,64.65 10.85,88.15 arc(10.94,88.36) 11.15,88.45 56.65,88.45 arc(56.86,88.36) 56.95,88.15 56.95,64.85 arc(56.86,64.64) 56.65,64.55 11.35,64.55 arc(11.14,64.64) 11.05,64.85 11.05,87.95 arc(11.14,88.16) 11.35,88.25 56.45,88.25 arc(56.66,88.16) 56.75,87.95 56.75,65.05 arc(56.66,64.84) 56.45,64.75 11.55,64.75 arc(11.34,64.84) 11.25,65.05 11.25,87.75 arc(11.34,87.96) 11.55,88.05 56.25,88.05 arc(56.46,87.96) 56.55,87.75 56.55,65.25 arc(56.46,65.04) 56.25,64.95 11.75,64.95 arc(11.54,65.04) 11.45,65.25 11.45,87.55 arc(11.54,87.76) 11.75,87.85 56.05,87.85 arc(56.26,87.76) 56.35,87.55 56.35,65.45 arc(56.26,65.24) 56.05,65.15 11.95,65.15 arc(11.74,65.24) 11.65,65.45 11.65,87.35 arc(11.74,87.56) 11.95,87.65 55.85,87.65 arc(56.06,87.56) 56.15,87.35 56.15,65.65 arc(56.06,65.44) 55.85,65.35 12.15,65.35 arc(11.94,65.44) 11.85,65.65 11.85,87.15 arc(11.94,87.36) 12.15,87.45 55.65,87.45 arc(55.86,87.36) 55.95,87.15 55.95,65.85 arc(55.86,65.64) 55.65,65.55 12.35,65.55 arc(12.14,65.64) 12.05,65.85 12.05,86.95 arc(12.14,87.16) 12.35,87.25 55.45,87.25 arc(55.66,87.16) 55.75,86.95 55.75,66.05 arc(55.66,65.84) 55.45,65.75 12.55,65.75 arc(12.34,65.84) 12.25,66.05 12.25,86.75 arc(12.34,86.96) 12.55,87.05 55.25,87.05 arc(55.46,86.96) 55.55,86.75 55.55,66.25 arc(55.46,66.04) 55.25,65.95 12.75,65.95 arc(12.54,66.04) 12.45,66.25 12.45,86.55 arc(12.54,86.76) 12.75,86.85 55.05,86.85 arc(55.26,86.76) 55.35,86.55 55.35,66.45 arc(55.26,66.24) 55.05,66.15 12.95,66.15 arc(12.74,66.24) 12.65,66.45 12.65,86.35 arc(12.74,86.56) 12.95,86.65 54.85,86.65 arc(55.06,86.56) 55.15,86.35 55.15,66.65 arc(55.06,66.44) 54.85,66.35 13.15,66.35 arc(12.94,66.44) 12.85,66.65 12.85,86.15 arc(12.94,86.36) 13.15,86.45 54.65,86.45 arc(54.86,86.36) 54.95,86.15 54.95,66.85 arc(54.86,66.64) 54.65,66.55 13.35,66.55 arc(13.14,66.64) 13.05,66.85 13.05,85.95 arc(13.14,86.16) 13.35,86.25 54.45,86.25 arc(54.66,86.16) 54.75,85.95 54.75,67.05 arc(54.66,66.84) 54.45,66.75 13.55,66.75 arc(13.34,66.84) 13.25,67.05 13.25,85.75 arc(13.34,85.96) 13.55,86.05 54.25,86.05 arc(54.46,85.96) 54.55,85.75 54.55,67.25 arc(54.46,67.04) 54.25,66.95 13.75,66.95 arc(13.54,67.04) 13.45,67.25 13.45,85.55 arc(13.54,85.76) 13.75,85.85 54.05,85.85 arc(54.26,85.76) 54.35,85.55 54.35,67.45 arc(54.26,67.24) 54.05,67.15 13.95,67.15 arc(13.74,67.24) 13.65,67.45 13.65,85.35 arc(13.74,85.56) 13.95,85.65 53.85,85.65 arc(54.06,85.56) 54.15,85.35 54.15,67.65 arc(54.06,67.44) 53.85,67.35 14.15,67.35 arc(13.94,67.44) 13.85,67.65 13.85,85.15 arc(13.94,85.36) 14.15,85.45 53.65,85.45 arc(53.86,85.36) 53.95,85.15 53.95,67.85 arc(53.86,67.64) 53.65,67.55 14.35,67.55 arc(14.14,67.64) 14.05,67.85 14.05,84.95 arc(14.14,85.16) 14.35,85.25 53.45,85.25 arc(53.66,85.16) 53.75,84.95 53.75,68.05 arc(53.66,67.84) 53.45,67.75 14.55,67.75 arc(14.34,67.84) 14.25,68.05 14.25,84.75 arc(14.34,84.96) 14.55,85.05 53.25,85.05 arc(53.46,84.96) 53.55,84.75 53.55,68.25 arc(53.46,68.04) 53.25,67.95 14.75,67.95 arc(14.54,68.04) 14.45,68.25 14.45,84.55 arc(14.54,84.76) 14.75,84.85 53.05,84.85 arc(53.26,84.76) 53.35,84.55 53.35,68.45 arc(53.26,68.24) 53.05,68.15 14.95,68.15 arc(14.74,68.24) 14.65,68.45 14.65,84.35 arc(14.74,84.56) 14.95,84.65 52.85,84.65 arc(53.06,84.56) 53.15,84.35 53.15,68.65 arc(53.06,68.44) 52.85,68.35 15.15,68.35 arc(14.94,68.44) 14.85,68.65 14.85,84.15 arc(14.94,84.36) 15.15,84.45 52.65,84.45 arc(52.86,84.36) 52.95,84.15 52.95,68.85 arc(52.86,68.64) 52.65,68.55 15.35,68.55 arc(15.14,68.64) 15.05,68.85 15.05,83.95 arc(15.14,84.16) 15.35,84.25 52.45,84.25 arc(52.66,84.16) 52.75,83.95 52.75,69.05 arc(52.66,68.84) 52.45,68.75 15.55,68.75 arc(15.34,68.84) 15.25,69.05 15.25,83.75 arc(15.34,83.96) 15.55,84.05 52.25,84.05 arc(52.46,83.96) 52.55,83.75 52.55,69.25 arc(52.46,69.04) 52.25,68.95 15.75,68.95 arc(15.54,69.04) 15.45,69.25 15.45,83.55 arc(15.54,83.76) 15.75,83.85 52.05,83.85 arc(52.26,83.76) 52.35,83.55 52.35,69.45 arc(52.26,69.24) 52.05,69.15 15.95,69.15 arc(15.74,69.24) 15.65,69.45 15.65,83.35 arc(15.74,83.56) 15.95,83.65 51.85,83.65 arc(52.06,83.56) 52.15,83.35 52.15,69.65 arc(52.06,69.44) 51.85,69.35 16.15,69.35 arc(15.94,69.44) 15.85,69.65 15.85,83.15 arc(15.94,83.36) 16.15,83.45 51.65,83.45 arc(51.86,83.36) 51.95,83.15 51.95,69.85 arc(51.86,69.64) 51.65,69.55 16.35,69.55 arc(16.14,69.64) 16.05,69.85 16.05,82.95 arc(16.14,83.16) 16.35,83.25 51.45,83.25 arc(51.66,83.16) 51.75,82.95 51.75,70.05 arc(51.66,69.84) 51.45,69.75 16.55,69.75 arc(16.34,69.84) 16.25,70.05 16.25,82.75 arc(16.34,82.96) 16.55,83.05 51.25,83.05 arc(51.46,82.96) 51.55,82.75 51.55,70.25 arc(51.46,70.04) 51.25,69.95 16.75,69.95 arc(16.54,70.04) 16.45,70.25 16.45,82.55 arc(16.54,82.76) 16.75,82.85 51.05,82.85 arc(51.26,82.76) 51.35,82.55 51.35,70.45 arc(51.26,70.24) 51.05,70.15 16.95,70.15 arc(16.74,70.24) 16.65,70.45 16.65,82.35 arc(16.74,82.56) 16.95,82.65 50.85,82.65 arc(51.06,82.56) 51.15,82.35 51.15,70.65 arc(51.06,70.44) 50.85,70.35 17.15,70.35 arc(16.94,70.44) 16.85,70.65 16.85,82.15 arc(16.94,82.36) 17.15,82.45 50.65,82.45 arc(50.86,82.36) 50.95,82.15 50.95,70.85 arc(50.86,70.64) 50.65,70.55 17.35,70.55 arc(17.14,70.64) 17.05,70.85 17.05,81.95 arc(17.14,82.16) 17.35,82.25 50.45,82.25 arc(50.66,82.16) 50.75,81.95 50.75,71.05 arc(50.66,70.84) 50.45,70.75 17.55,70.75 arc(17.34,70.84) 17.25,71.05 17.25,81.75 arc(17.34,81.96) 17.55,82.05 50.25,82.05 arc(50.46,81.96) 50.55,81.75 50.55,71.25 arc(50.46,71.04) 50.25,70.95 17.75,70.95 arc(17.54,71.04) 17.45,71.25 17.45,81.55 arc(17.54,81.76) 17.75,81.85 50.05,81.85 arc(50.26,81.76) 50.35,81.55 50.35,71.45 arc(50.26,71.24) 50.05,71.15 17.95,71.15 arc(17.74,71.24) 17.65,71.45 17.65,81.35 arc(17.74,81.56) 17.95,81.65 49.85,81.65 arc(50.06,81.56) 50.15,81.35 50.15,71.65 arc(50.06,71.44) 49.85,71.35 18.15,71.35 arc(17.94,71.44) 17.85,71.65 17.85,81.15 arc(17.94,81.36) 18.15,81.45 49.65,81.45 arc(49.86,81.36) 49.95,81.15 49.95,71.85 arc(49.86,71.64) 49.65,71.55 18.35,71.55 arc(18.14,71.64) 18.05,71.85 18.05,80.95 arc(18.14,81.16) 18.35,81.25 49.45,81.25 arc(49.66,81.16) 49.75,80.95 49.75,72.05 arc(49.66,71.84) 49.45,71.75 18.55,71.75 arc(18.34,71.84) 18.25,72.05 18.25,80.75 arc(18.34,80.96) 18.55,81.05 49.25,81.05 arc(49.46,80.96) 49.55,80.75 49.55,72.25 arc(49.46,72.04) 49.25,71.95 18.75,71.95 arc(18.54,72.04) 18.45,72.25 18.45,80.55 arc(18.54,80.76) 18.75,80.85 49.05,80.85 arc(49.26,80.76) 49.35,80.55 49.35,72.45 arc(49.26,72.24) 49.05,72.15 18.95,72.15 arc(18.74,72.24) 18.65,72.45 18.65,80.35 arc(18.74,80.56) 18.95,80.65 48.85,80.65 arc(49.06,80.56) 49.15,80.35 49.15,72.65 arc(49.06,72.44) 48.85,72.35 19.15,72.35 arc(18.94,72.44) 18.85,72.65 18.85,80.15 arc(18.94,80.36) 19.15,80.45 48.65,80.45 arc(48.86,80.36) 48.95,80.15 48.95,72.85 arc(48.86,72.64) 48.65,72.55 19.35,72.55 arc(19.14,72.64) 19.05,72.85 19.05,79.95 arc(19.14,80.16) 19.35,80.25 48.45,80.25 arc(48.66,80.16) 48.75,79.95 48.75,73.05 arc(48.66,72.84) 48.45,72.75 19.55,72.75 arc(19.34,72.84) 19.25,73.05 19.25,79.75 arc(19.34,79.96) 19.55,80.05 48.25,80.05 arc(48.46,79.96) 48.55,79.75 48.55,73.25 arc(48.46,73.04) 48.25,72.95 19.75,72.95 arc(19.54,73.04) 19.45,73.25 19.45,79.55 arc(19.54,79.76) 19.75,79.85 48.05,79.85 arc(48.26,79.76) 48.35,79.55 48.35,73.45 arc(48.26,73.24) 48.05,73.15 19.95,73.15 arc(19.74,73.24) 19.65,73.45 19.65,79.35 arc(19.74,79.56) 19.95,79.65 47.85,79.65 arc(48.06,79.56) 48.15,79.35 48.15,73.65 arc(48.06,73.44) 47.85,73.35 20.15,73.35 arc(19.94,73.44) 19.85,73.65 19.85,79.15 arc(19.94,79.36) 20.15,79.45 47.65,79.45 arc(47.86,79.36) 47.95,79.15 47.95,73.85 arc(47.86,73.64) 47.65,73.55 20.35,73.55 arc(20.14,73.64) 20.05,73.85 20.05,78.95 arc(20.14,79.16) 20.35,79.25 47.45,79.25 arc(47.66,79.16) 47.75,78.95 47.75,74.05 arc(47.66,73.84) 47.45,73.75 20.55,73.75 arc(20.34,73.84) 20.25,74.05 20.25,78.75 arc(20.34,78.96) 20.55,79.05 47.25,79.05 arc(47.46,78.96) 47.55,78.75 47.55,74.25 arc(47.46,74.04) 47.25,73.95 20.75,73.95 arc(20.54,74.04) 20.45,74.25 20.45,78.55 arc(20.54,78.76) 20.75,78.85 47.05,78.85 arc(47.26,78.76) 47.35,78.55 47.35,74.45 arc(47.26,74.24) 47.05,74.15 20.95,74.15 arc(20.74,74.24) 20.65,74.45 20.65,78.35 arc(20.74,78.56) 20.95,78.65 46.85,78.65 arc(47.06,78.56) 47.15,78.35 47.15,76.8 arc(47.06,76.59) 46.85,76.5 v1(46,76.5)
